# Altium PCB main.PcbDoc
Units mil, origin at the board's own origin, x right, y up, seen from the top; angles counter-clockwise.
Board outline 1600 x 1600 mil, 6 copper layers (Top Layer, GND Plane, Signal Layer 1, Signal Layer 2, VCC Plane, Bottom Layer), stack 61.4 mil thick; 101 components, 82 nets, 396 pads, 208 vias.
Unrouted connection lines stored in the file: 2.
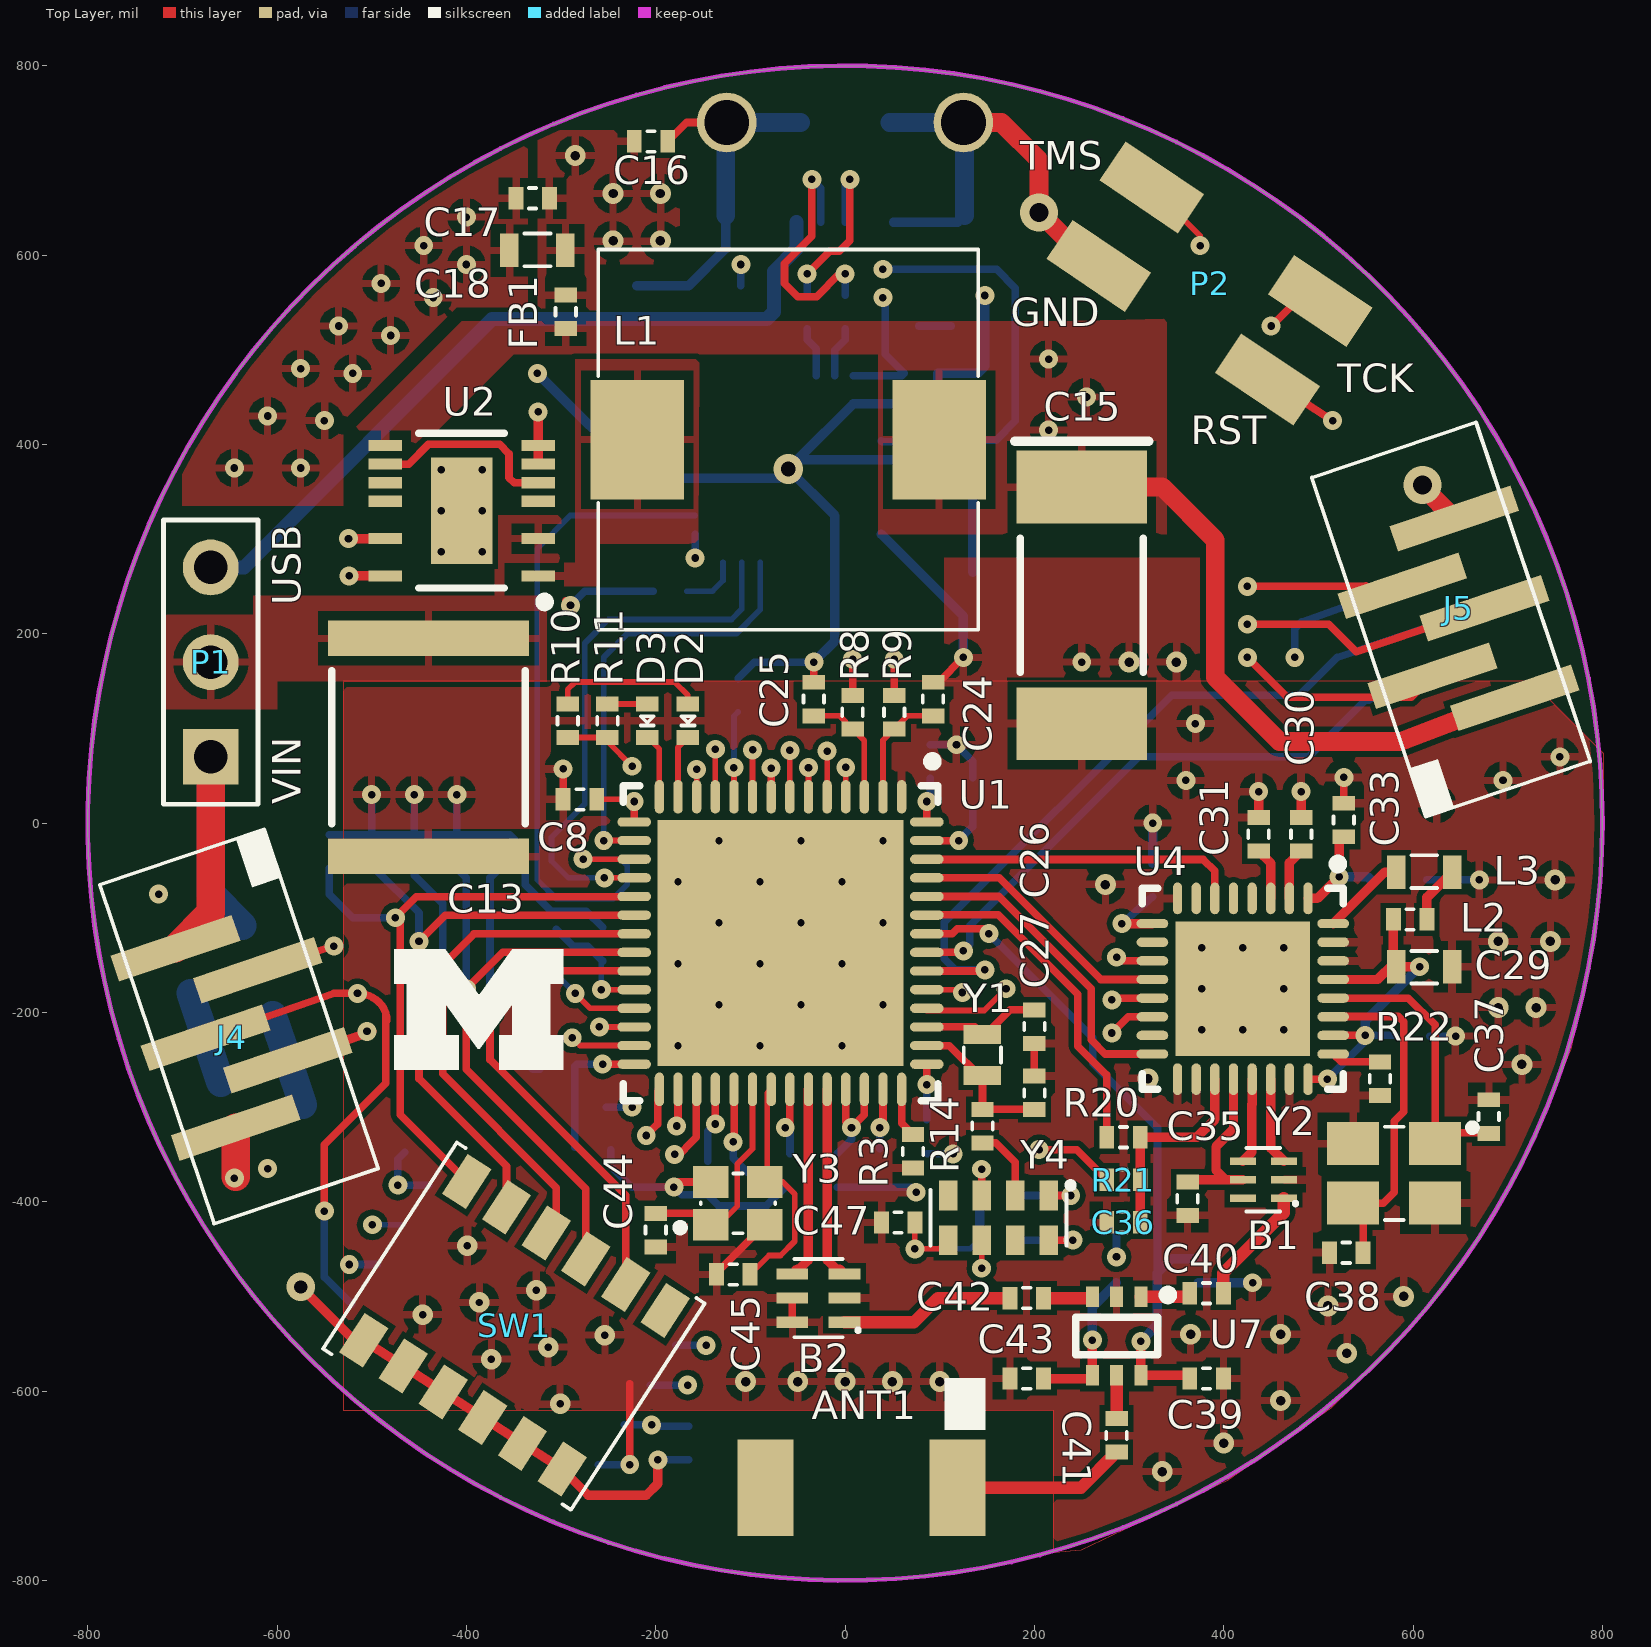
[diagram p0: Top Layer view]
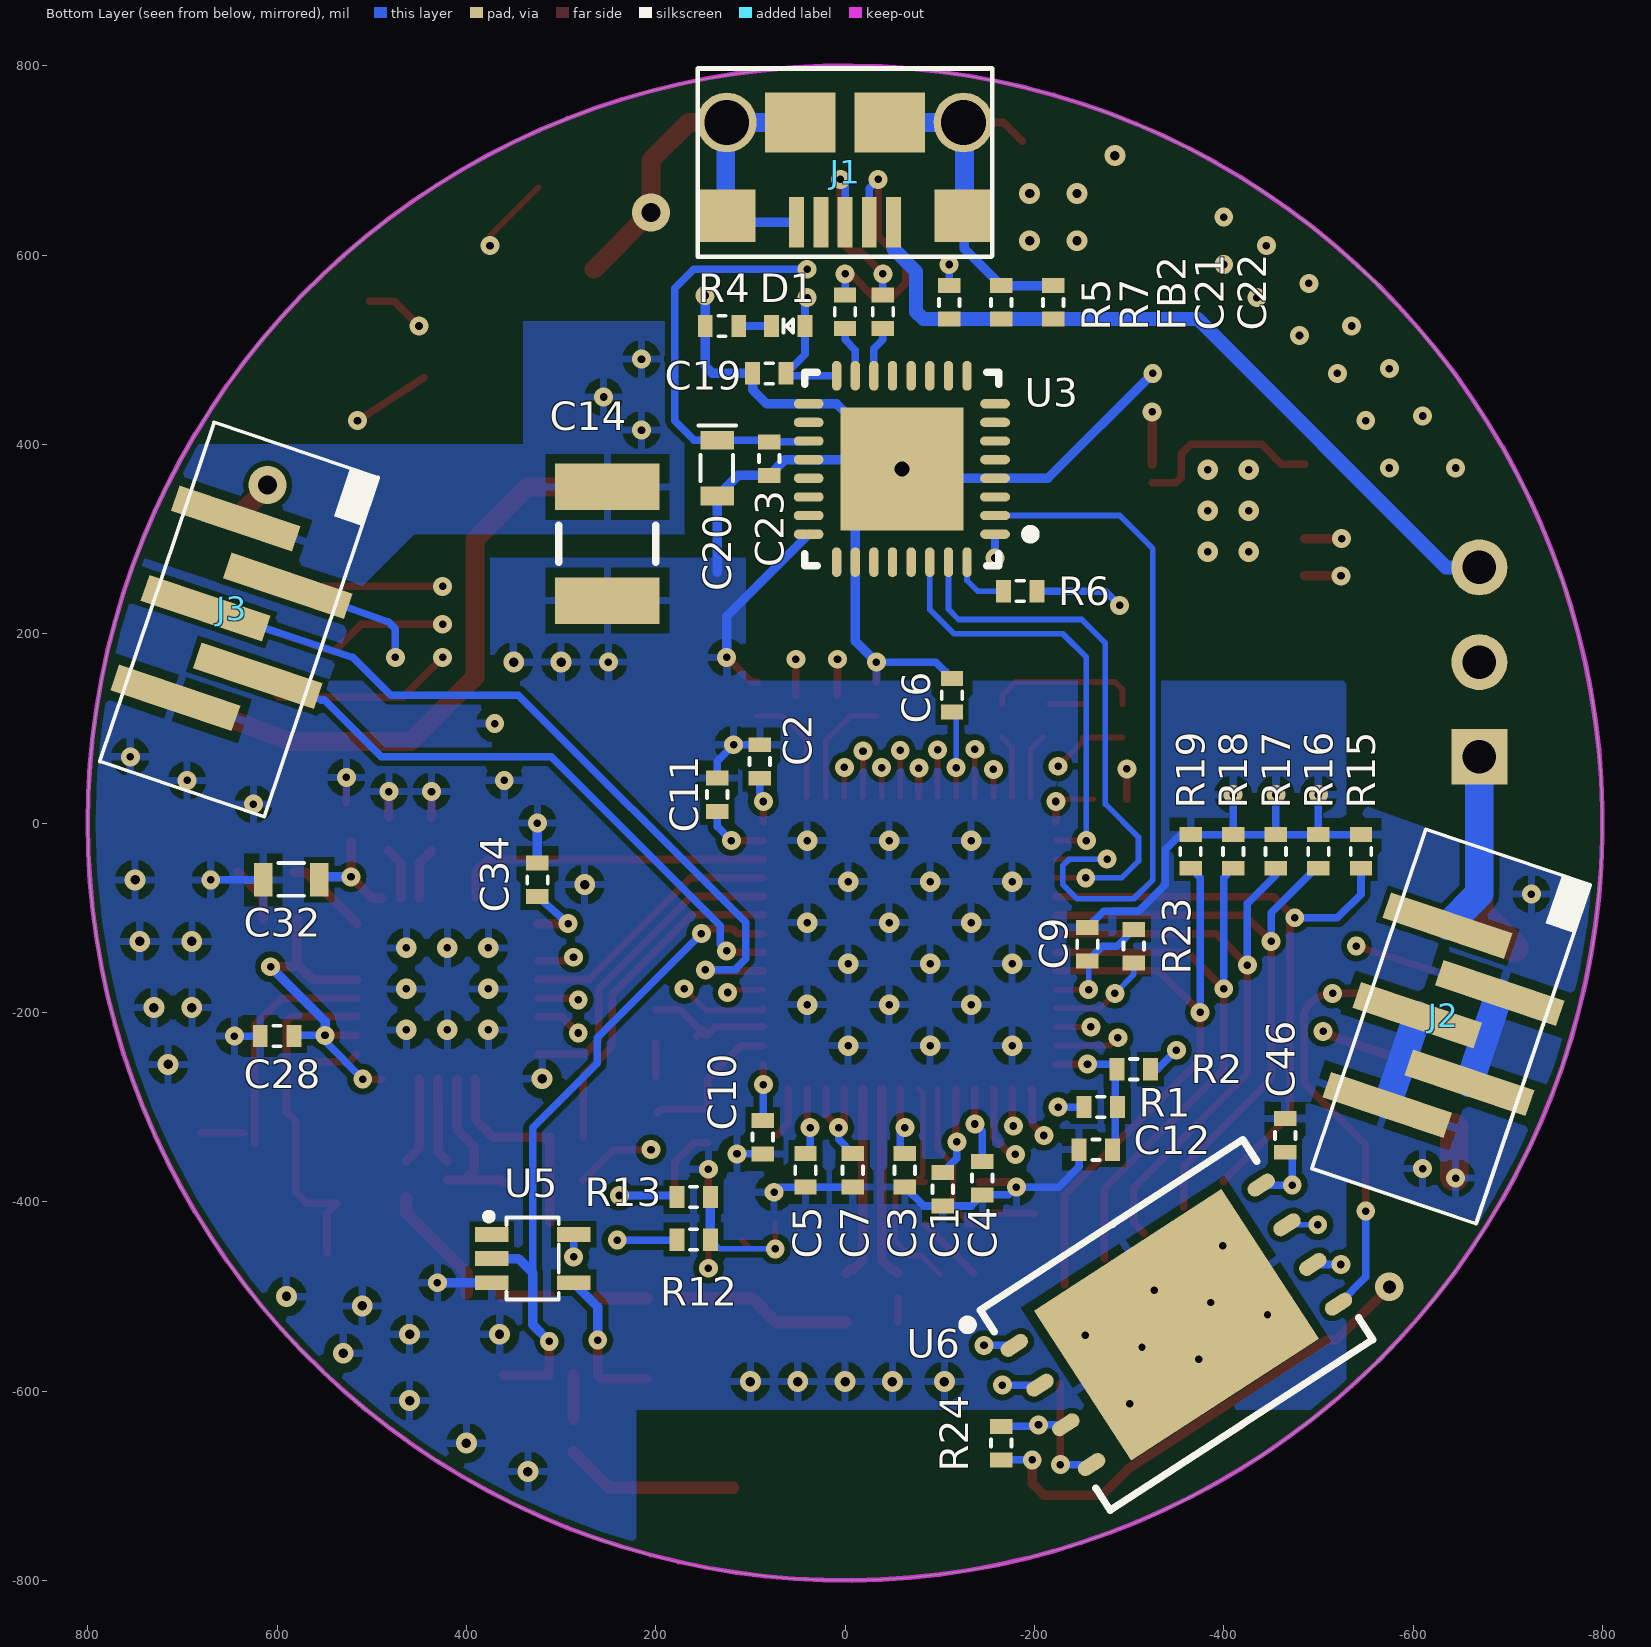
[diagram p1: Bottom Layer view, seen from below]
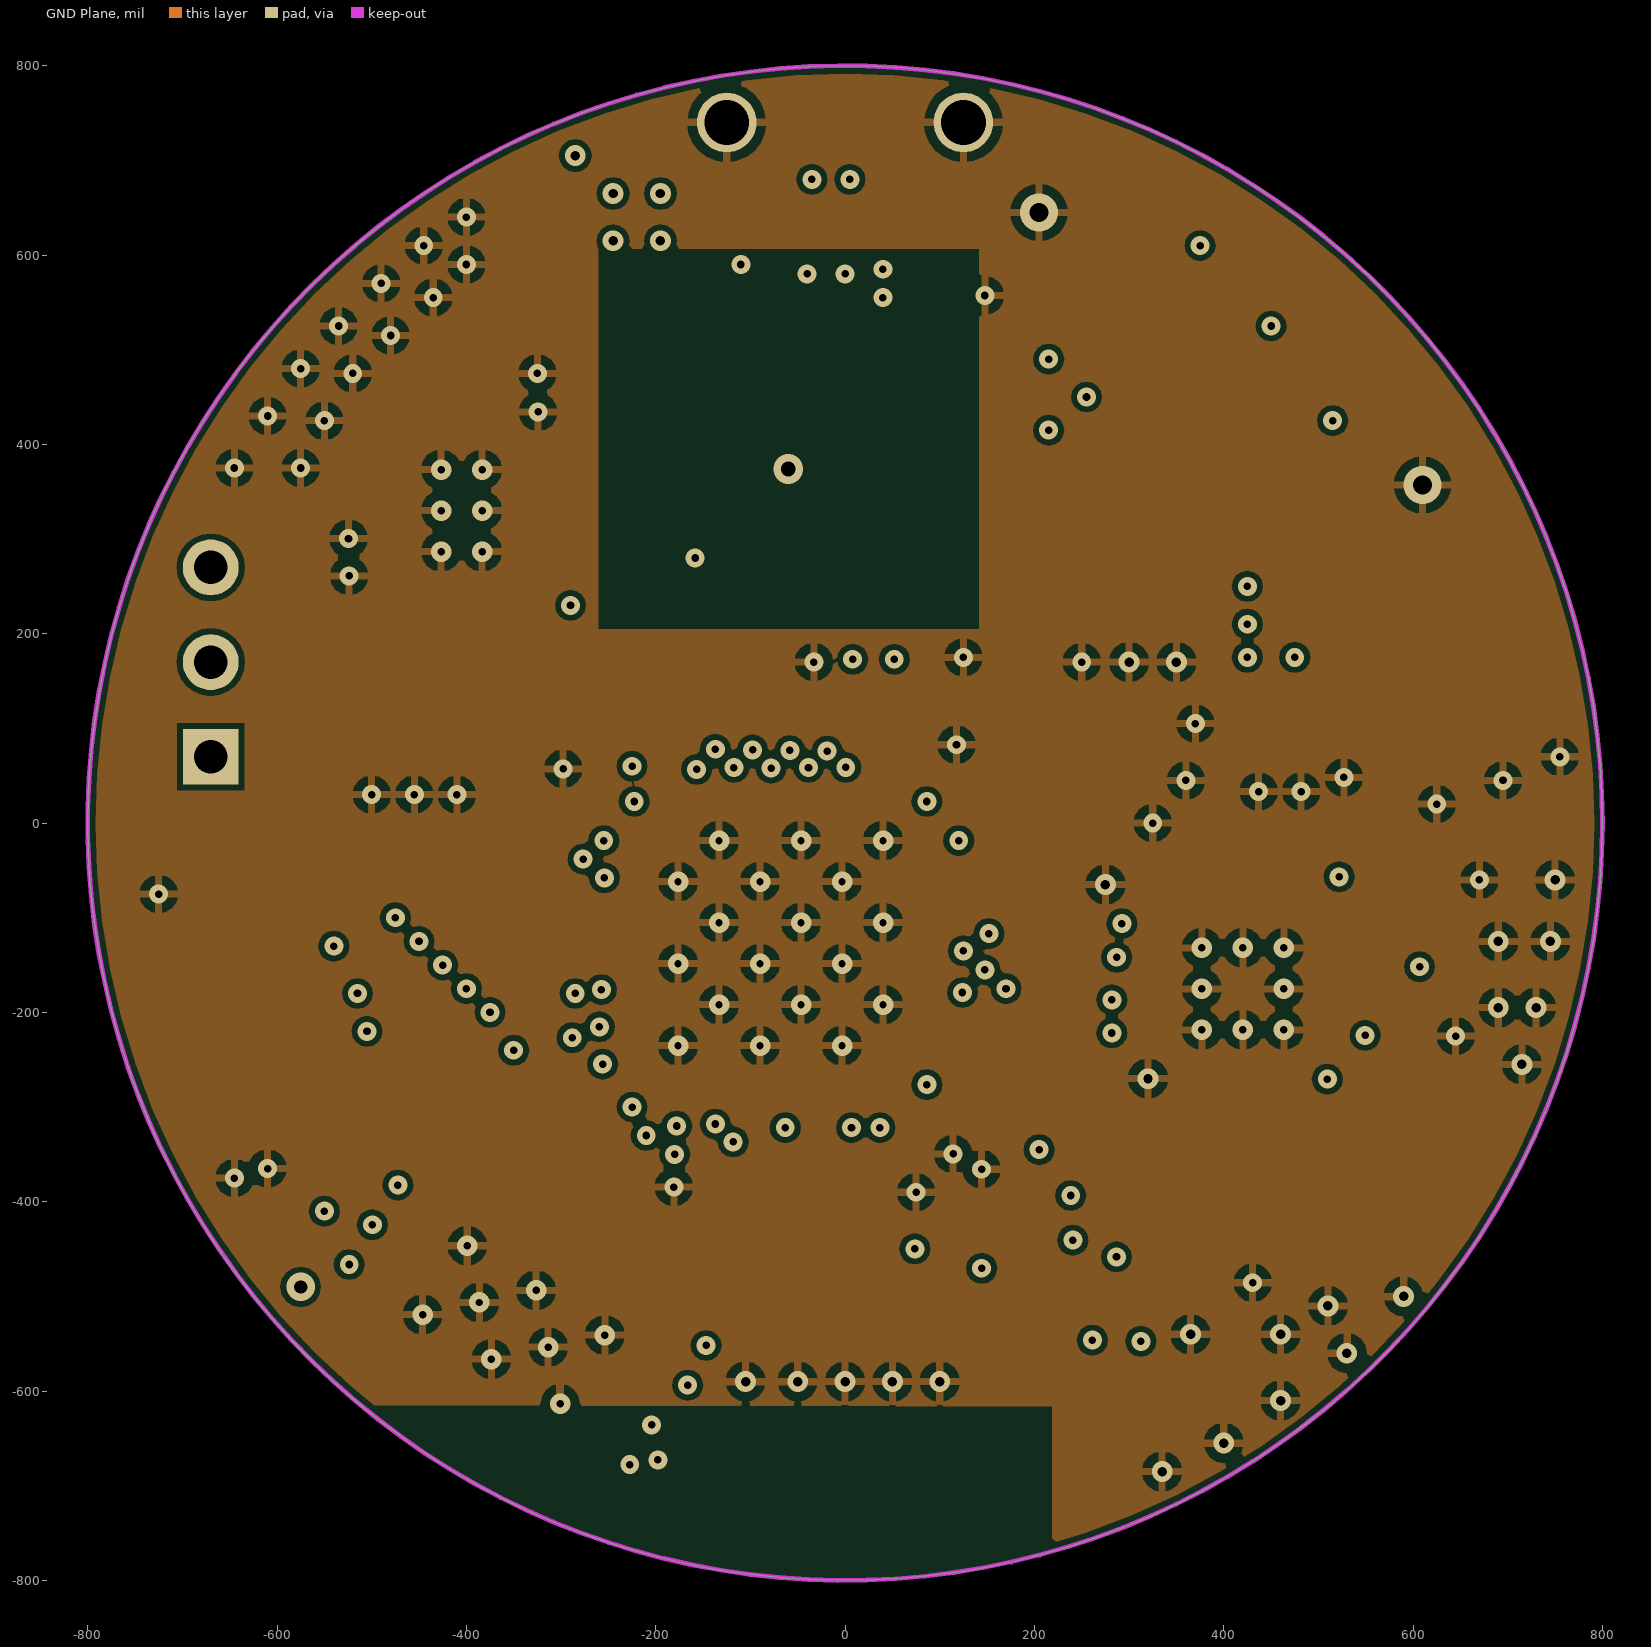
[diagram p2: GND Plane]
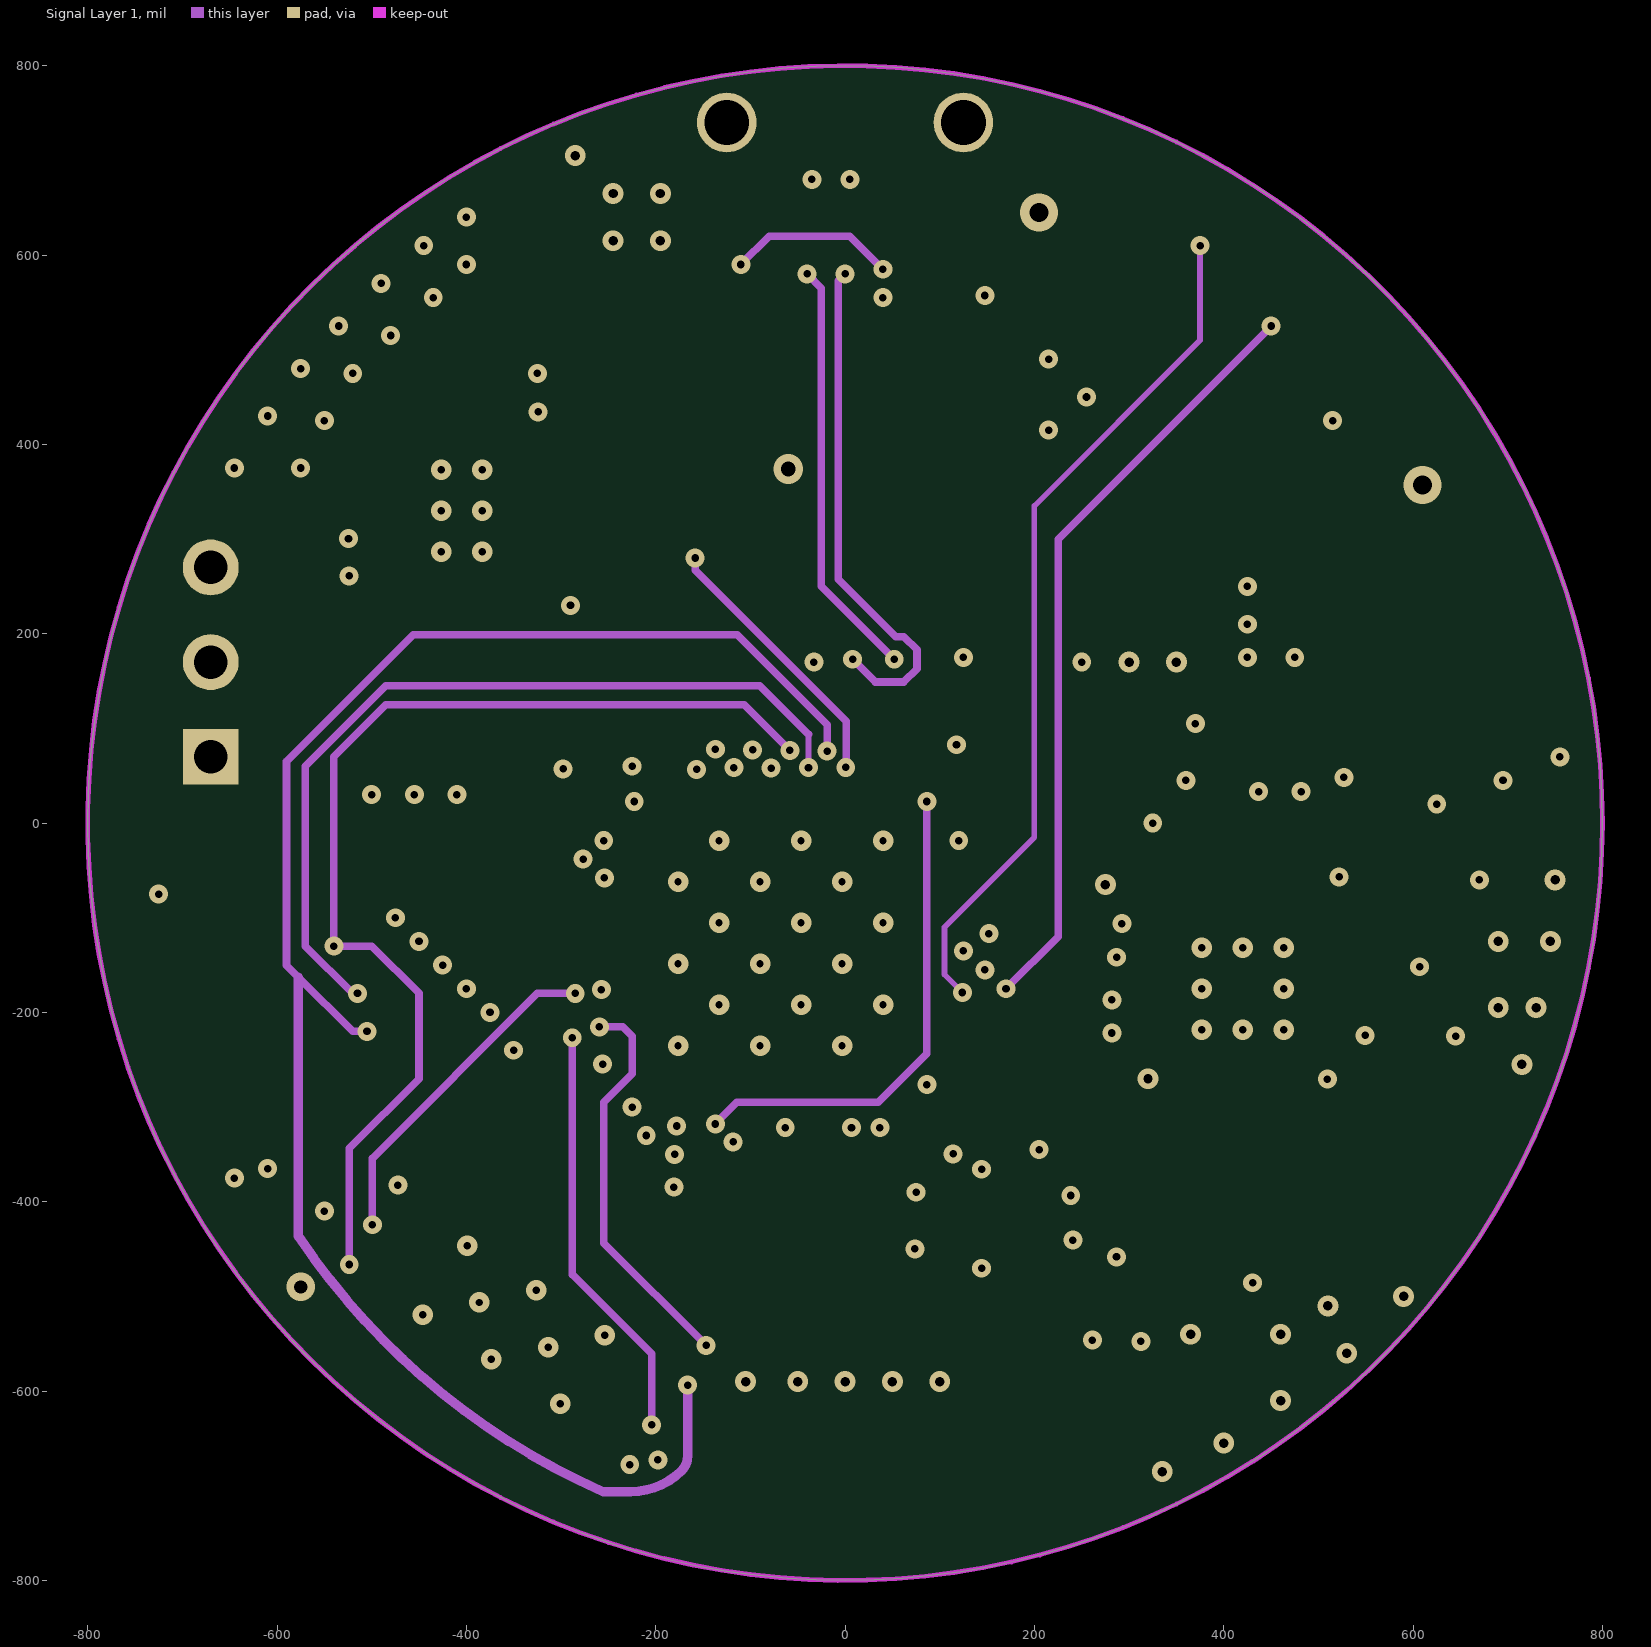
[diagram p3: Signal Layer 1]
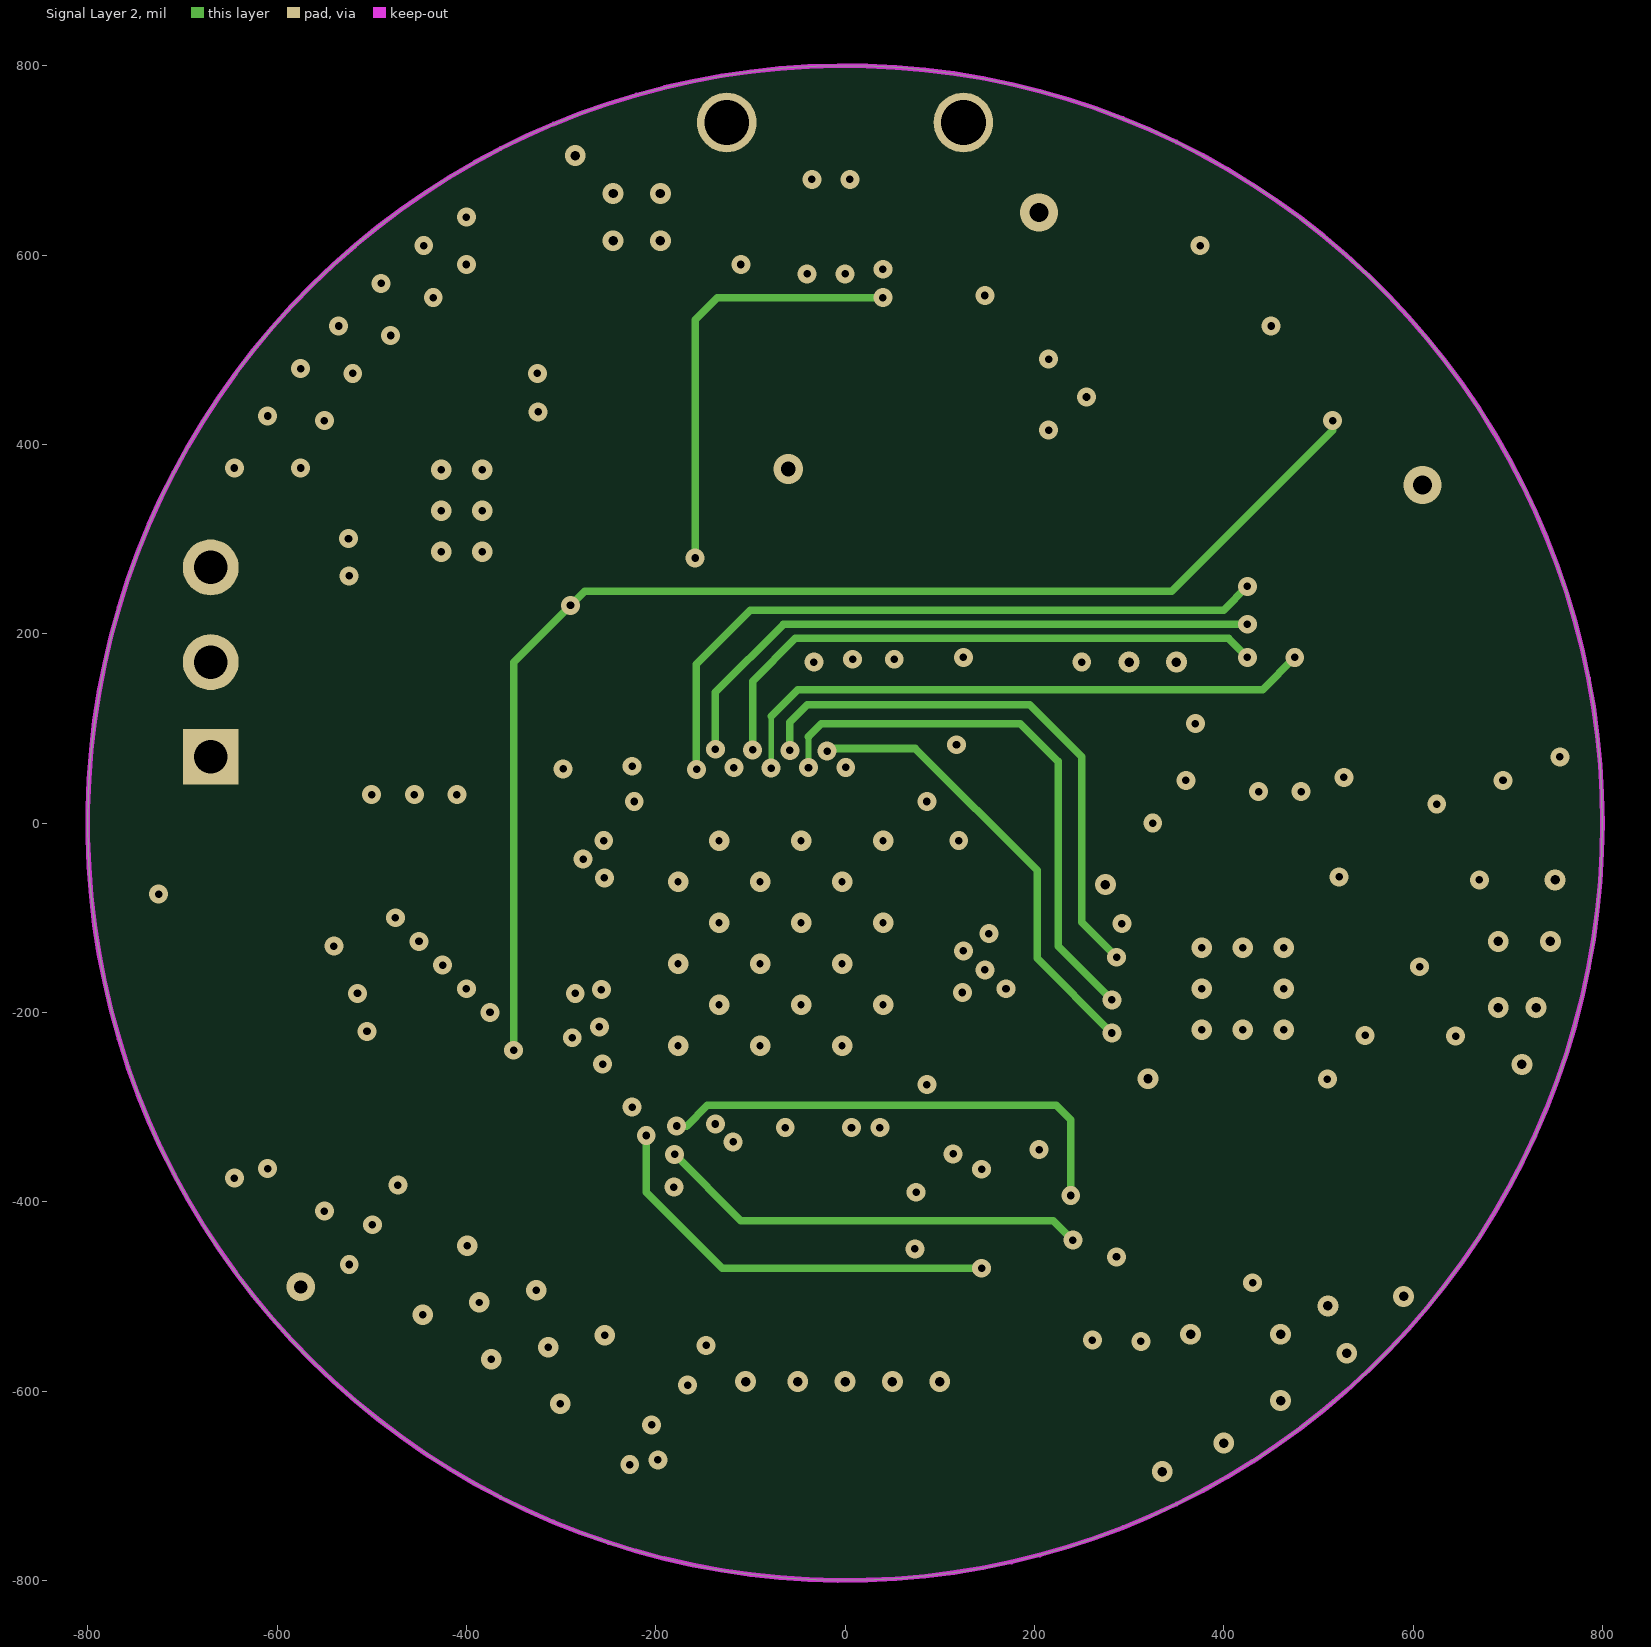
[diagram p4: Signal Layer 2]
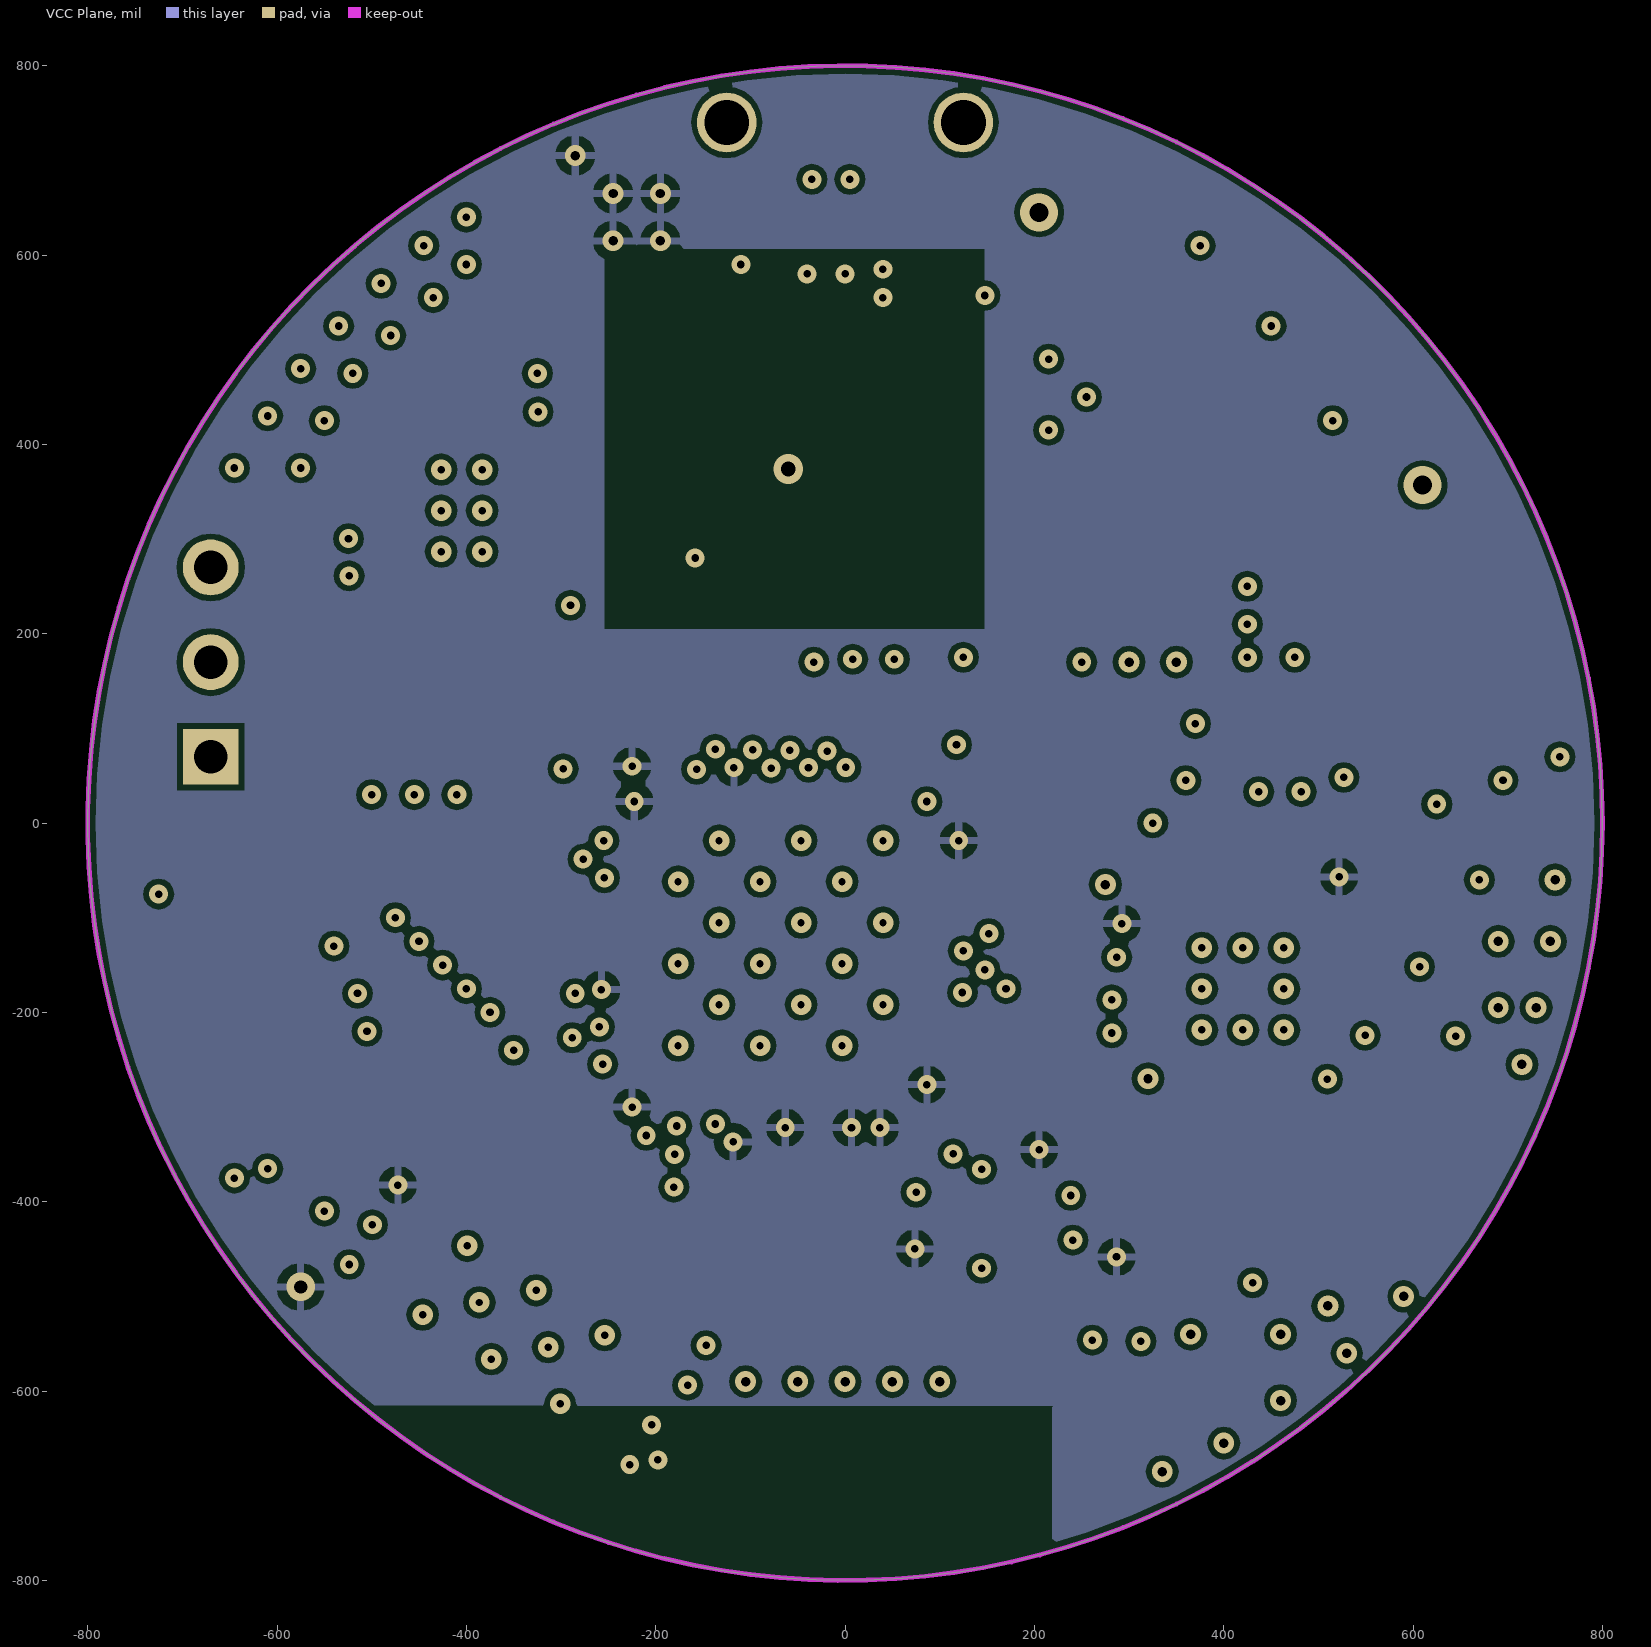
[diagram p5: VCC Plane]

## Layer stack, top to bottom
Top Solder: solder mask 0.4, Solder Resist, Dk 3.5
Top Layer: signal copper 1.9
Dielectric 1: core 7.2, PrePreg 2113, Dk 4.2
GND Plane: signal copper 1.4
Dielectric 6: prepreg 14, FR-4, Dk 4.2
Signal Layer 1: signal copper 1.4
Dielectric 5: core 9.6, PrePreg 2113, Dk 4.2
Signal Layer 2: signal copper 1.4
Dielectric 2: prepreg 14, FR-4, Dk 4.2
VCC Plane: signal copper 1.4
Dielectric 7: core 7.2, PrePreg2113, Dk 4.2
Bottom Layer: signal copper 1.9
Bottom Solder: solder mask 0.4, Solder Resist, Dk 3.5

## Board outline
-800,0 ccw(c0,0) 0,-800 ccw(c0,0) 800,0 ccw(c0,0) 0,800 ccw(c0,0)

## Design rules (kind name [scope] priority, off if disabled: settings)
Clearance "Clearance~Sunstone Circuits" [All] p1: gap=6 // Sunstone Circuits Minimum Clearance Rule (MLB~4&6 Layer Designs)
DiffPairsRouting [All] p1: maxlimit=10 minlimit=10 mostfreqgap=10 toplayer_minwidth=6 toplayer_maxwidth=15 toplayer_prefwidth=15 midlayer1_minwidth=6 midlayer1_maxwidth=15 midlayer1_prefwidth=15 midlayer2_minwidth=6 midlayer2_maxwidth=15 midlayer2_prefwidth=15 midlayer3_minwidth=6 midlayer3_maxwidth=15 midlayer3_prefwidth=15 midlayer4_minwidth=6 midlayer4_maxwidth=15 midlayer4_prefwidth=15 bottomlayer_minwidth=6 bottomlayer_maxwidth=15 bottomlayer_prefwidth=15 maxuncoupledlength=500
HoleSize "HoleSize~Sunstone Circuits" [All] p1: absolutevalues=TRUE maxlimit=251 minlimit=8 maxpercent=80.000 minpercent=20.000 // Sunstone Circuits Hole Size Rule (MLB~4&6 Layer Designs)
HoleSize Testpoint [All] p2: absolutevalues=TRUE maxlimit=100 minlimit=1 maxpercent=80.000 minpercent=20.000
HoleSize TestPointUsage [All] p3: absolutevalues=TRUE maxlimit=100 minlimit=1 maxpercent=80.000 minpercent=20.000
MinimumAnnularRing "MinimumAnnularRing~Sunstone Circuits" [All] p1: minimumring=6 // Sunstone Circuits Minimum Annular Ring (MLB~4&6 Layer Designs)
MinimumSolderMaskSliver [All] p1 off: minsoldermaskwidth=10
PlaneClearance "PlaneClearance~Sunstone Circuits" [All] p1: clearance=12 // Sunstone Circuits Power Plane Clearance Rule (MLB~4&6 Layer Designs)
PlaneConnect "PlaneConnect~Sunstone Circuits" [All] p1: planeconnectstyle=Relief reliefexpansion=10 reliefentries=4 reliefconductorwidth=8 reliefairgap=10 // Sunstone Circuits Power Plane Connect Rule (MLB~4&6 Layer Designs)
PolygonConnect "PolygonConnect~Sunstone Circuits" [All] p1: connectstyle=Relief reliefconductorwidth=8 reliefentries=4 polygonreliefangle="90 Angle" airgapwidth=10 // Sunstone Circuits Polygon Connect Style (MLB~4&6 Layer Designs)
RoomDefinition U_main_rtc [InComponentClass('U_main_rtc')] p1 off: confinementstyle=ConfineIn formatcopy=TRUE lockcomponents=FALSE outline -3501,-2693 -1501,-2693 -1501,-1693 -3501,-1693
RoomDefinition U_main_rf [InComponentClass('U_main_rf')] p2 off: confinementstyle=ConfineIn formatcopy=TRUE lockcomponents=FALSE outline -3501,-2693 -1501,-2693 -1501,-1693 -3501,-1693
RoomDefinition U_main_pwr [InComponentClass('U_main_pwr')] p3 off: confinementstyle=ConfineIn formatcopy=TRUE lockcomponents=FALSE outline -3501,-2693 -1501,-2693 -1501,-1693 -3501,-1693
RoomDefinition U_main_mem [InComponentClass('U_main_mem')] p4 off: confinementstyle=ConfineIn formatcopy=TRUE lockcomponents=FALSE outline -3501,-2693 -1501,-2693 -1501,-1693 -3501,-1693
RoomDefinition U_main_IO [InComponentClass('U_main_IO')] p5 off: confinementstyle=ConfineIn formatcopy=TRUE lockcomponents=FALSE outline -3501,-2693 -1501,-2693 -1501,-1693 -3501,-1693
RoomDefinition U_main_ftdi [InComponentClass('U_main_ftdi')] p6 off: confinementstyle=ConfineIn formatcopy=TRUE lockcomponents=FALSE outline -3501,-2693 -1501,-2693 -1501,-1693 -3501,-1693
RoomDefinition U_main_connector [InComponentClass('U_main_connector')] p7 off: confinementstyle=ConfineIn formatcopy=TRUE lockcomponents=FALSE outline -3501,-2693 -1501,-2693 -1501,-1693 -3501,-1693
RoutingVias "RoutingVias~Sunstone Circuits" [All] p1: holewidth=16 width=30 viastyle="Through Hole" minholewidth=8 minwidth=18 maxholewidth=20 maxwidth=40 // Sunstone Circuits Routing Vias Rule (MLB~4&6 Layer Designs)
ShortCircuit "ShortCircuit~Sunstone Circuits" [All] p1: allowed=FALSE // Sunstone Circuits Short Circuit Rule~Do Not Allow (MLB~4&6 Layer Designs)
SilkToSilkClearance [All] p1 off: silktosilkclearance=10
SilkToSolderMaskClearance [IsPad] p1 off: minsilkscreentomaskgap=10 clearancetoexposedcopper=TRUE
SolderMaskExpansion "Tent Vias" [isvia] p1: expansion=-12 // Sunstone Circuits Solder Mask Expansion Rule (MLB~4&6 Layer Designs)
SolderMaskExpansion "SolderMaskExpansion~Sunstone Circuits" [All] p2: expansion=3 // Sunstone Circuits Solder Mask Expansion Rule (MLB~4&6 Layer Designs)
UnpouredPolygon [All] p1: allowunpoured=FALSE
ViasUnderSMD "ViasUnderSMD~Sunstone Circuits" [All] p1: allowed=FALSE // Sunstone Circuits Vias Under SMD~Do Not Allow (MLB~4&6 Layer Designs)
Width "Width~Sunstone Circuits" [All] p1: maxlimit=100 minlimit=6 preferedwidth=10 // Sunstone Circuits Minimum Width Rule (MLB~4&6 Layer Designs)
21 further rules are at their usual default settings.

## Classes and differential pairs
component class U_main_rtc: C47 Y4
component class U_main_rf: ANT1 B1 B2 C28 C29 C30 C31 C32 C33 C34 C35 C36 C37 C38 C39 C40 C41 C42 C43 C44 C45 L2 L3 R20 R21 R22 U4 U5 U7 Y2 Y3
component class U_main_pwr: C1 C2 C3 C4 C5 C6 C7 C8 C9 C10 C11 C12 C13 C14 C15 C16 C17 C18 FB1 L1 P1 R1 R2 R3 U1 U2
component class U_main_mem: C46 R23 R24 U6
component class U_main_IO: C26 C27 D2 D3 R10 R11 R12 R13 R14 R15 R16 R17 R18 R19 SW1 Y1
component class U_main_ftdi: C19 C20 C21 C22 C23 C24 C25 D1 FB2 J1 R4 R5 R6 R7 R8 R9 U3
component class U_main_connector: J2 J3 J4 J5 P2
differential pair USB: +USB_P -USB_N
differential pair USB_MCU: +USB_MCU_P -USB_MCU_N
differential pair USB_FTDI: +USB_FTDI_P -USB_FTDI_N
differential pair CC2538_RF: +CC2538_RF_P -CC2538_RF_N
differential pair BLE_ANT: +BLE_ANT_P -BLE_ANT_N

## Components (designator, comment, footprint, x,y, rotation, side; value= is the part's Value field where it differs from the comment)
ANT1 "Ground Antenna" "Chip Antenna" 37,-707 r180 top
B1 "2450BM14A0002" 2450BM14A0002 441.83,-376.78 r180 top
B2 "2450BM15A0002E" 2450BM15A0002 -28.17,-501.78 r180 top
C1 "Ceramic capacitor" 0402 -103.17,-386.78 r270 bottom
C2 "Ceramic capacitor" 0402 90,65 r90 bottom
C3 "Ceramic capacitor" 0402 -63.17,-366.78 r270 bottom
C4 "Ceramic capacitor" 0402 -145,-375 r270 bottom
C5 "Ceramic capacitor" 0402 41.83,-366.78 r270 bottom
C6 "Ceramic capacitor" 0402 -113,135 r90 bottom
C7 "Ceramic capacitor" 0402 -8.17,-366.78 r270 bottom
C8 "Ceramic capacitor" 0402 -280,25 r180 top
C9 "Ceramic capacitor" 0402 -256,-128 r90 bottom
C10 "Ceramic capacitor" 0402 86.83,-331.78 r270 bottom
C11 "Ceramic capacitor" 0402 135,30 r90 bottom
C12 "Ceramic capacitor" 0402 -265,-345 r0 bottom
C13 "Ceramic capacitor" 2220 -440,80 r270 top
C14 "Ceramic capacitor" 1210 255,295 r90 bottom
C15 "Ceramic capacitor" 2917 250,230 r270 top
C16 "Ceramic capacitor" 0402 -205,720 r0 top
C17 "Ceramic capacitor" 0402 -330,660 r180 top
C18 "Ceramic capacitor" 0603 -325,605 r180 top
C19 "Ceramic capacitor" 0402 80,475 r0 bottom
C20 "Tantalum capacitor" "0603 - Polar Marking" 135,375 r270 bottom
C21 "Ceramic capacitor" 0402 -165,550 r90 bottom
C22 "Ceramic capacitor" 0402 -220,550 r90 bottom
C23 "Ceramic capacitor" 0402 80,385 r270 bottom
C24 "Ceramic capacitor" 0402 93,131 r90 top
C25 "Ceramic capacitor" 0402 -33,131 r90 top
C26 "Ceramic capacitor" 0402 200,-215 r270 top
C27 "Ceramic capacitor" 0402 200,-285 r90 top
C28 "Ceramic capacitor" 0402 600,-225 r0 bottom
C29 "Ceramic capacitor" 0603 611.83,-151.78 r0 top
C30 "Ceramic capacitor" 0402 481.83,-11.78 r90 top
C31 "Ceramic capacitor" 0402 436.83,-11.78 r90 top
C32 "Ceramic capacitor" 0603 585,-60 r0 bottom
C33 "Ceramic capacitor" 0402 526.83,3.22 r90 top
C34 "Ceramic capacitor" 0402 325,-60 r90 bottom
C35 "Ceramic capacitor" 0402 361.83,-396.78 r270 top
C36 "Ceramic capacitor" 0402 294.12,-421.78 r180 top
C37 "Ceramic capacitor" 0402 680,-310 r90 top
C38 "Ceramic capacitor" 0402 529.48,-453.9 r180 top
C39 "Ceramic capacitor" 0402 381.83,-586.78 r180 top
C40 "Ceramic capacitor" 0402 381.83,-496.78 r180 top
C41 "Ceramic capacitor" 0402 286.83,-646.78 r270 top
C42 "Ceramic capacitor" 0402 191.83,-501.78 r0 top
C43 "Ceramic capacitor" 0402 191.83,-586.78 r180 top
C44 "Ceramic capacitor" 0402 -200,-430 r90 top
C45 "Ceramic capacitor" 0402 -118.17,-476.78 r0 top
C46 "Ceramic capacitor" 0402 -465,-330 r90 bottom
C47 "Ceramic capacitor" 0402 56,-422 r180 top
D1 "LED, Green" "0402 - DIODE" 60,525 r0 bottom
D2 "LED, Red" "0402 - DIODE" -166,108 r270 top
D3 "LED, Green" "0402 - DIODE" -209,108 r270 top
FB1 "Ferrite Bead" 0402 -295,540 r270 top
FB2 "Ferrite Bead" 0402 -110,550 r270 bottom
J1 "micro USB-B" "Micro USB-B" 0,740 r0 bottom
J2 "Samtec connector" SFM-105-02-L-S -640,-215 r288.6 bottom
J3 "Samtec connector" SFM-105-02-L-S 640,215 r288.6 bottom locked
J4 "Samtec connector" SFM-105-02-L-S -640,-215 r288.6 top
J5 "Samtec connector" SFM-105-02-L-S 640,215 r108.6 top locked
L1 "L_22uH_SLF10145" SLF10145 -60,405 r180 top
L2 "Chip inductor" 0402 596.83,-101.78 r0 top
L3 "Chip inductor" 0603 611.83,-51.78 r180 top
P1 "1 x 3 header" "1x3 header" -670,170 r90 top
P2 "2 x 2 header SMD" "2x2 header SMD" 385,570 r56 top
R1 "Chip resistor" 0402 -270,-300 r180 bottom
R2 "Chip resistor" 0402 -305,-260 r180 bottom
R3 "Chip resistor" 0402 71.83,-346.78 r270 top
R4 "Chip resistor" 0402 130,525 r0 bottom
R5 "Chip resistor" 0402 0,540 r90 bottom
R6 "Chip resistor" 0402 -185,245 r180 bottom
R7 "Chip resistor" 0402 -40,540 r90 bottom
R8 "Chip resistor" 0402 8,117 r270 top
R9 "Chip resistor" 0402 52,117 r270 top
R10 "Chip resistor" 0402 -293,108 r270 top
R11 "Chip resistor" 0402 -251,108 r270 top
R12 "Chip resistor" 0402 160,-440 r0 bottom
R13 "Chip resistor" 0402 160,-395 r0 bottom
R14 "Chip resistor" 0402 145.19,-320.16 r270 top
R15 "Chip resistor" 0402 -545,-30 r270 bottom
R16 "Chip resistor" 0402 -500,-30 r270 bottom
R17 "Chip resistor" 0402 -455,-30 r270 bottom
R18 "Chip resistor" 0402 -410,-30 r270 bottom
R19 "Chip resistor" 0402 -365,-30 r270 bottom
R20 "Chip resistor" 0402 294.12,-331.78 r0 top
R21 "Chip resistor" 0402 294.12,-376.78 r180 top
R22 "Chip resistor" 0402 565,-270 r270 top
R23 "Chip resistor" 0402 -305,-130 r270 bottom
R24 "Chip resistor" 0402 -165,-655 r90 bottom
SW1 "CHS-06TA" CHS-06TA -350,-530 r57 top
U1 "CC2538" QFN56 -68.17,-126.78 r270 top
U2 "LTC3630" MSE16(12) -405,330 r180 top
U3 "FT232RQ" QFN-32 -60,374 r0 bottom
U4 "nRF8001" QFN32 420.14,-175.09 r270 top
U5 "SN74AUP1T14" "SC-70-5 (DCK)" 330,-460 r270 bottom
U6 "SST25VF064C" WSON -350,-530 r147 bottom
U7 "uPG2214TB" minimold-6 286.83,-541.78 r270 top
Y1 "ABS05" ABS05 145,-245 r90 top
Y2 "TSX-3225" TSX-3225 580,-370 r180 top
Y3 "FA-128" FA-128 -113.17,-401.78 r0 top
Y4 "RV-4162-C7" RV4162 162,-417 r180 top

## Footprints (in the part's own frame and the unit in brackets; to place one, negate y for a bottom-side part, rotate by r counter-clockwise, add the part's x,y. Pads: shape width x height; smd on the part's side, far side on the other; paste and mask are expansions set on the pad)
"1x3 header" [mm] "1x3 header, 100 mils"
  rect 1.5x1.5 hole 0.9: 1(-2.54,0)
  round 1.5 hole 0.9: 2(0,0) 3(2.54,0)
  silkscreen extent -3.81,-1.27 3.81,1.27, body extent -3.8,-1.25 3.8,1.25, height 8.38
"2x2 header SMD" [mm] "100 mils header, SMD"
  rect 1.27x2.54 smd: 1(-1.27,-2.73) 2(-1.27,2.73) 3(1.27,-2.73) 4(1.27,2.73)
  body extent -2.54,-3.43 2.54,3.43, height 9.7
0402 [mm] "2-Leads, Body 1.00x0.50mm, IPC Medium Density"
  rect 0.4x0.6 smd: 1(-0.45,0) 2(0.45,0)
  silkscreen extent -0.1,-0.28 0.1,0.28, body extent -0.53,-0.28 0.53,0.27, height 0.4
"0402 - DIODE" [mm] "2-Leads, Body 1.00x0.50mm, IPC Medium Density"
  rect 0.4x0.6 smd: 1(-0.45,0) 2(0.45,0)
  silkscreen extent -0.13,-0.18 0.13,0.18, body extent -0.53,-0.28 0.53,0.27, height 0.4
0603 [mm] "2-Leads, Body 1.55x0.85mm, IPC Medium Density"
  rect 0.5x0.9 smd: 1(-0.75,0) 2(0.75,0)
  silkscreen extent -0.35,-0.45 0.35,0.43, body extent -0.75,-0.42 0.75,0.43, height 0.5
"0603 - Polar Marking" [mm] "2-Leads, Body 1.55x0.85mm, IPC Medium Density"
  rect 0.5x0.9 smd: 1(-0.75,0) 2(0.75,0)
  silkscreen extent -1.14,-0.51 0.35,0.51, body extent -0.75,-0.42 0.75,0.43, height 0.5
1210 [mm]
  rect 1.25x2.8 smd: 1(1.525,-0.102) 2(-1.525,-0.102)
  silkscreen extent -0.5,-1.4 0.5,1.2, body extent -1.8,-1.5 1.8,1.3, height 2.8
2220 [mm] "Chip Capacitor, 2-Leads, Body 5.70x5.00mm, IPC Medium Density"
  rect 0.95x5.4 smd: 1(-2.925,0) 2(2.925,0)
  silkscreen extent -2.05,-2.6 2.05,2.6, body extent -3.05,-2.7 3.05,2.7, height 2.5
2450BM14A0002 [mm] "Chip Array, Flat, 6-Leads, Pitch 0.50mm,  Body 1.60x0.80mm,  IPC Medium Density"
  rect 0.7x0.2 smd: 1(-0.55,0.5) 2(-0.55,0) 3(-0.55,-0.5) 4(0.55,-0.5) 5(0.55,0) 6(0.55,0.5)
  silkscreen extent -0.91,-0.85 0.45,0.85, body extent -0.45,-0.85 0.45,0.85, height 0.71
2450BM15A0002 [mm] "Chip Array, Flat, 6-Leads, Pitch 0.65mm,  Body 2.00x1.25mm,  IPC Medium Density"
  rect 0.85x0.3 smd: 1(-0.7,0.65) 2(-0.7,0) 3(-0.7,-0.65) 4(0.7,-0.65) 5(0.7,0) 6(0.7,0.65)
  silkscreen extent -1.11,-1.05 0.65,1.05, body extent -0.67,-1.05 0.67,1.05, height 0.81
2917 [mm] "Chip Capacitor, 2-Leads, Body 7.30x3.20mm, IPC Medium Density"
  rect 1.95x3.5 smd: 1(-3.175,0) 2(3.175,0)
  silkscreen extent -4.4,-1.8 1.8,1.8, body extent -3.8,-1.75 3.8,1.75, height 3.1
ABS05 [mm] "ABS05 Crystal"
  rect 0.5x1 smd: 1(-0.55,0) 2(0.55,0)
  silkscreen extent -0.2,-0.5 0.2,0.5, body extent -0.8,-0.5 0.8,0.5, height 0.5
"Chip Antenna" [mm] "FR05-S1-N-0-102"
  rect 1.5x2.6 smd: 1(-2.075,-0.125) ""(3.075,-0.125)
  silkscreen extent -2.83,-3.08 -1.73,-1.68, body extent -3.03,-1.63 3.98,1.38, height 2.2
CHS-06TA [mil] "6 POS DIP SWITCH"
  rect 50x29.92 smd: 1(-100,124) 2(100,124) 3(-100,74) 4(100,74) 5(-100,24) 6(100,24) 7(-100,-26) 8(100,-26) 9(-100,-76) 10(100,-76) 11(-100,-126) 12(100,-126)
  silkscreen extent -131,-157 129,155, body extent -131,-157 129,155, height 98
FA-128 [mm] "Seiko Epson FA-128 Crystal"
  rect 0.95x0.85 smd: 1(-0.725,-0.575) 2(0.725,-0.575) 3(0.725,0.575) 4(-0.725,0.575)
  silkscreen extent -1.63,-0.8 1,0.8, body extent -1,-0.8 1,0.8, height 0.5
"Micro USB-B" [mm]
  rect 0.4x1.35 smd mask+0.1: 1(-1.3,2.675) 2(-0.65,2.675) 3(0,2.675) 4(0.65,2.675) 5(1.3,2.675)
  rect 1.6x1.4 smd mask+0.1: 6(-3.2,2.5) 6(3.2,2.5)
  round 1.6 hole 1.2: 6(-3.175,0) 6(3.175,0)
  rect 1.9x1.6 smd mask+0.1: 6(-1.2,0) 6(1.2,0)
  silkscreen extent -3.95,-1.45 3.95,3.6, body extent -4.1,-2.54 4.1,2.89, height 2.68
minimold-6 [mm] "SOTFL, 6-Leads, Body 2.00x2.10mm, Pitch 0.65mm, IPC Medium Density"
  rect 0.55x0.35 smd: 1(-1.05,0.65) 2(-1.05,0) 3(-1.05,-0.65) 4(1.05,-0.65) 5(1.05,0) 6(1.05,0.65)
  silkscreen extent -1.22,-1.1 0.5,1.5, body extent -0.67,-1.1 0.67,1.1, height 1
MSE16(12) [mm] "TSSOP, 16-Leads, Body 4.04x3.00mm, Pitch 0.50mm, Thermal Pad 2.95x1.75mm, IPC Medium Density"
  rect 0.9x0.3 smd: 1(-2.05,1.75) 3(-2.05,0.75) 5(-2.05,-0.25) 6(-2.05,-0.75) 7(-2.05,-1.25) 8(-2.05,-1.75) 9(2.05,-1.75) 10(2.05,-1.25) 11(2.05,-0.75) 12(2.05,-0.25) 14(2.05,0.75) 16(2.05,1.75)
  rect 1.65x2.85 smd: 17(0,0)
  silkscreen extent -2.35,-2.08 1.15,2.57, body extent -1.55,-2.05 1.55,2.05, height 1.1
QFN32 [mm] "QFN, 32-Leads, Body 5.00x5.00mm, Pitch 0.50mm, Thermal Pad 3.60x3.60mm, IPC Medium Density"
  oval 0.85x0.25 smd: 1(-2.425,1.75) 2(-2.425,1.25) 3(-2.425,0.75) 4(-2.425,0.25) 5(-2.425,-0.25) 6(-2.425,-0.75) 7(-2.425,-1.25) 8(-2.425,-1.75) 17(2.425,-1.75) 18(2.425,-1.25) 19(2.425,-0.75) 20(2.425,-0.25) 21(2.425,0.25) 22(2.425,0.75) 23(2.425,1.25) 24(2.425,1.75)
  oval 0.25x0.85 smd: 9(-1.75,-2.425) 10(-1.25,-2.425) 11(-0.75,-2.425) 12(-0.25,-2.425) 13(0.25,-2.425) 14(0.75,-2.425) 15(1.25,-2.425) 16(1.75,-2.425) 25(1.75,2.425) 26(1.25,2.425) 27(0.75,2.425) 28(0.25,2.425) 29(-0.25,2.425) 30(-0.75,2.425) 31(-1.25,2.425) 32(-1.75,2.425)
  rect 3.6x3.6 smd: 33(0,0)
  silkscreen extent -3.47,-2.7 2.7,2.7, body extent -2.55,-2.55 2.55,2.55, height 0.9
QFN56 [mm] "QFN, 56-Leads, Body 8.00x8.00mm, Pitch 0.50mm, Thermal Pad 6.60x6.60mm, IPC Medium Density"
  oval 0.9x0.25 smd: 1(-3.925,3.25) 2(-3.925,2.75) 3(-3.925,2.25) 4(-3.925,1.75) 5(-3.925,1.25) 6(-3.925,0.75) 7(-3.925,0.25) 8(-3.925,-0.25) 9(-3.925,-0.75) 10(-3.925,-1.25) 11(-3.925,-1.75) 12(-3.925,-2.25) 13(-3.925,-2.75) 14(-3.925,-3.25) 29(3.925,-3.25) 30(3.925,-2.75) 31(3.925,-2.25) 32(3.925,-1.75) 33(3.925,-1.25) 34(3.925,-0.75) 35(3.925,-0.25) 36(3.925,0.25) 37(3.925,0.75) 38(3.925,1.25) 39(3.925,1.75) 40(3.925,2.25) 41(3.925,2.75) 42(3.925,3.25)
  oval 0.25x0.9 smd: 15(-3.25,-3.925) 16(-2.75,-3.925) 17(-2.25,-3.925) 18(-1.75,-3.925) 19(-1.25,-3.925) 20(-0.75,-3.925) 21(-0.25,-3.925) 22(0.25,-3.925) 23(0.75,-3.925) 24(1.25,-3.925) 25(1.75,-3.925) 26(2.25,-3.925) 27(2.75,-3.925) 28(3.25,-3.925) 43(3.25,3.925) 44(2.75,3.925) 45(2.25,3.925) 46(1.75,3.925) 47(1.25,3.925) 48(0.75,3.925) 49(0.25,3.925) 50(-0.25,3.925) 51(-0.75,3.925) 52(-1.25,3.925) 53(-1.75,3.925) 54(-2.25,3.925) 55(-2.75,3.925) 56(-3.25,3.925)
  rect 6.6x6.6 smd: 57(0,0)
  silkscreen extent -5,-4.22 4.22,4.23, body extent -4.08,-4.07 4.07,4.08, height 1
QFN-32 [mm] "32-Pin QFN 0.5 mm Pitch"
  oval 0.8x0.25 smd: 1(-2.5,1.75) 2(-2.5,1.25) 3(-2.5,0.75) 4(-2.5,0.25) 5(-2.5,-0.25) 6(-2.5,-0.75) 7(-2.5,-1.25) 8(-2.5,-1.75) 17(2.5,-1.75) 18(2.5,-1.25) 19(2.5,-0.75) 20(2.5,-0.25) 21(2.5,0.25) 22(2.5,0.75) 23(2.5,1.25) 24(2.5,1.75)
  oval 0.25x0.8 smd: 9(-1.75,-2.5) 10(-1.25,-2.5) 11(-0.75,-2.5) 12(-0.25,-2.5) 13(0.25,-2.5) 14(0.75,-2.5) 15(1.25,-2.5) 16(1.75,-2.5) 25(1.75,2.5) 26(1.25,2.5) 27(0.75,2.5) 28(0.25,2.5) 29(-0.25,2.5) 30(-0.75,2.5) 31(-1.25,2.5) 32(-1.75,2.5)
  rect 3.3x3.3 smd: 33(0,0)
  silkscreen extent -3.57,-2.6 2.6,2.6, body extent -2.58,-2.58 2.58,2.58, height 0.8
RV4162 [mm] "RTC"
  rect 0.5x0.8 smd: 1(-1.35,-0.6) 2(-0.45,-0.6) 3(0.45,-0.6) 4(1.35,-0.6) 5(1.35,0.6) 6(0.45,0.6) 7(-0.45,0.6) 8(-1.35,0.6)
  silkscreen extent -1.97,-0.91 1.83,0.75, body extent -1.6,-0.75 1.6,0.75, height 0.8
"SC-70-5 (DCK)" [mm]
  rect 0.4x0.9 smd mask+0.05: 1(-0.65,-1.1) 2(0,-1.1) 3(0.65,-1.1) 4(0.65,1.1) 5(-0.65,1.1)
  silkscreen extent -1.18,-1.23 1.1,0.7, body extent -1.1,-0.7 1.1,0.7, height 1.1
SFM-105-02-L-S [mm] "Samtec TFM, single row, 5 pos"
  rect 0.73x3.43 smd: 1(-2.54,-0.95) 2(-1.27,0.95) 3(0,-0.95) 4(1.27,0.95) 5(2.54,-0.95)
  silkscreen extent -4.8,-2.32 4.8,2.33, body extent -5.15,-0.9 5.15,1.53, height 4.57
SLF10145 [mm] "TDK chip inductors"
  rect 2.5x3.2 smd: 1(-4.05,0) 2(4.05,0)
  silkscreen extent -5.1,-5.1 5.1,5.1, body extent -5.1,-5.1 5.1,5.1, height 4.5
TSX-3225 [mm] "Seiko Epson TSX-3225 Crystal"
  rect 1.4x1.15 smd: 1(-1.1,-0.8) 2(1.1,-0.8) 3(1.1,0.8) 4(-1.1,0.8)
  silkscreen extent -2.17,-1.3 0.25,1.25, body extent -1.6,-1.25 1.6,1.25, height 0.6
WSON [mm] "QFN, 8-Leads, Body 8.00x6.00mm, Pitch 1.27mm, Thermal Pad 6.00x4.80mm, IPC Medium Density"
  oval 0.8x0.4 smd: 1(-3.95,1.905) 2(-3.95,0.635) 3(-3.95,-0.635) 4(-3.95,-1.905) 5(3.95,-1.905) 6(3.95,-0.635) 7(3.95,0.635) 8(3.95,1.905)
  rect 6x4.8 smd: 9(0,0)
  silkscreen extent -4.82,-3.2 4.2,3.2, body extent -4.05,-3.05 4.05,3.05, height 0.8

## Part data
ANT1: "2.4GHz Surface Mount Device (SMD) On Ground Antenna, 50 Ohms"
B1: "2.45 GHz Balun for nRF8001"
B2: "2.45 GHz Balun for TI CC253X"
C1 C3 C5 C6 C8 C9 C10 C16 C19 C22 C23 C30 C34 C46 C47: library part C_0.1u_0402_ceramic, "Ceramic capacitor, 0.1u, 0402 package"
C2 C4 C11 C17 C21 C33: library part C_1u_0402_ceramic, "Ceramic capacitor, 1 uF, 0402 package"
C7: library part C_220p_0402_ceramic, "Ceramic capacitor, 220 pF, 0402 package"
C12 C28 C36 C39 C43: library part C_1000p_0402_ceramic, "Ceramic capacitor, 1000 pF, 0402 package"
C13: library part C_4.7u_2220_ceramic, "Ceramic capacitor, 4.7u, 2220 package"
C14: library part C_100u_1210_ceramic, "Ceramic capacitor, 100u, 1210 package"
C15: library part C_100u_2917_tantalum, "Tantalum capacitor, 100u, 2917 package"
C18 C32: library part C_10u_0603_ceramic, "Ceramic capacitor, 10 uF, 0603 package"
C20: library part C_4.7u_0603_tantalum, "Tantalum capacitor, 4.7 uF, 0603 package"
C24 C25: library part C_47p_0402_ceramic, "Ceramic capacitor, 47 pF, 0402 package"
C26 C27: library part C_22p_0402_ceramic, "Ceramic capacitor, 22 pF, 0402 package"
C29: library part C_1u_0603_ceramic, "Ceramic capacitor, 1 uF, 0603 package"
C31: library part C_0.033u_0402_ceramic, "Ceramic capacitor, 0.033 uF, 0402 package"
C35: library part C_2200p_0402_ceramic, "Ceramic capacitor, 2200 pF, 0402 package"
C37 C38 C44 C45: library part C_12p_0402_ceramic, "Ceramic capacitor, 12 pF, 0402 package"
C40 C41 C42: library part C_100p_0402_ceramic, "Ceramic capacitor, 100 pF, 0402 package"
D1 D3: library part D_LED_GREEN_0402, "LED, Green,  0402"
D2: library part D_LED_RED_0402, "LED, Red, 0402"
FB1 FB2: library part FB_150mA_0402, "Ferrite Bead, 150 mA, 0402 package"
J1: library part "Micro USB", "CONN USB MICRO B RECPT SMT R/A"
J2 J3 J4 J5: library part "Samtec conntector", "Samtec connector, 1.27 mm, single row, 5 pos SMD"
L1: "Inductor, 22 uH, TDK SLF10145"
L2: library part L_15n_0402, "Chip inductor, 15 nH, 0402 package"
L3: library part L_10u_0603, "Chip inductor, 10 uH, 0603 package"
P1: "100 mils standard header"
P2: "2x2 100 mil header SMD"
R1 R21 R23 R24: library part R_100K_0402, "Chip resistor, 100K, 0402 package"
R2 R20: library part R_2.2K_0402, "Chip resistor, 2.2K, 0402 package"
R3: library part R_56K_0402, "Chip resistor, 56K, 0402 package"
R4 R11: library part R_619_0402, "Chip resistor, 619, 0402 package"
R5 R6 R7 R14: library part R_0_0402, "Chip resistor, 0, 0402 package"
R8 R9: library part R_33_0402, "Chip resistor, 33, 0402 package"
R10: library part R_750_0402, "Chip resistor, 750, 0402 package"
R12 R13 R15 R16 R17 R18 R19: library part R_10K_0402, "Chip resistor, 10K, 0402 package"
R22: library part R_22K_0402, "Chip resistor, 22K, 0402 package"
SW1: "SLIDE SWITCHES"
U1: "A Powerful System-On-Chip for 2.4-GHz IEEE 802.15.4, 6LoWPAN  and ZigBee Applications"
U2: "High Efficiency, 65V 500mA synchronous Step-Down Converter"
U3: "FT232R USB UART"
U4: "Single-chip Bluetooth low energy solution"
U5: "LOW POWER, 1.8/2.5/3.3-V INPUT, 3.3-V CMOS OUTPUT, SINGLE  SCHMITT-TRIGGER INVERTER GATE"
U6: "64 Mbit SPI Serial Dual I/O Flash"
U7: "GaAs Integrated Circuit for L, S-Band SPDT Switch"
Y1: "32768 Hz SMD Low profile crystal"
Y2 Y3: "MHz Range Crystal Unit"
Y4: "Real Time Clock Module with I2C Bus"

## Via types
v1: diameter 20, hole 8, Top Layer to Bottom Layer, 136 vias
v2: diameter 21.65, hole 7.87, Top Layer to Bottom Layer, 40 vias
v3: diameter 22, hole 10, Top Layer to Bottom Layer, 28 vias
v4: diameter 40, hole 20, Top Layer to Bottom Layer, 2 vias
v5: diameter 30, hole 14, Top Layer to Bottom Layer, 1 vias
v6: diameter 31.5, hole 15.75, Top Layer to Bottom Layer, tented top, 1 vias

## Nets (pads, with @x,y where several pads share a name; then routed paths per layer and width w, separated by ;. In a path a pad name is that pad's centre, name@x,y a point inside that pad or via, vN(x,y) a via of type N, cw(c..) or ccw(c..) an arc to the next point about the centre after c; other vN are vias at no path point)
ANTENNA: ANT1.1 C41.2 | length 183.7
  Top Layer w13.02: ANT1.1 249.25,-702.08 C41.2
B\L\E\_\C\S\: U1.53 U4.12 | length 282.8
  Top Layer w8: U1.53 162.94,-57.88 270.3,-165.24 U4.12
B\L\E\_\R\D\Y\: U1.52 U4.16 | length 338.8
  Top Layer w8: U1.52 162.42,-77.57 260,-175.15 260,-228.98 275,-243.98 U4.16
B\L\E\_\R\E\S\E\T\: R20.1 U1.51 | length 358.4
  Top Layer w8: U1.51 86.36,-96.78 161.83,-96.78 246,-180.94 246,-235.74 276.4,-266.15 R20.1
BLE_ACTIVE: U1.54 U4.6 | length 338.6
  Top Layer w8: U1.54 86.36,-38.51 378.57,-38.51 390.61,-50.56 U4.6
BLE_ANT_N: B1.3 U4.22 | length 92.3
  Top Layer w10: U4.22 449.67,-296.78 449.83,-296.94 449.83,-343.43 B1.3
BLE_ANT_P: B1.4 U4.21 | length 90.6
  Top Layer w10: B1.4 429.83,-347.45 429.83,-296.94 429.98,-296.78 U4.21
CC2538/N\R\F\8\0\0\1\: C39.2 U1.50 U5.2 U7.6 | length 714.6
  Top Layer w8: U1.50 113.39,-116.94 118.55,-111.78 146.83,-111.78 v1(151.83,-116.78)
  Top Layer w10: v1(312.43,-547.43) U7.6 C39.2@360.46,-583.12
  Bottom Layer w8: v1(151.83,-116.78) 261.83,-226.78 261.83,-253.83 330,-322 330,-475
  Bottom Layer w10: v1(312.43,-547.43) 330,-529.85 330,-475 345,-460 U5.2
CC2538_RESETN: P2.1 R2.2 R6.2 | length 1606
  Top Layer w8: v1@-295,235 v1(-290,230) ; P2.1@445,470.27 v1(515,425)
  Signal Layer 2 w8: v1(-350,-240) -350,170 v1(-290,230) -275,245 345,245 515,415 v1(515,425)
  Bottom Layer w8: v1(-350,-240) -330,-260 R2.2 ; v1(-290,230) -275,245 R6.2
CC2538_RF_N: B2.3 U1.38 | length 204.7
  Top Layer w10: U1.38 -18.95,-304.02 -18.8,-304.18 -18.8,-461.78 -9.39,-471.19 -5.61,-471.19 B2.3
CC2538_RF_P: B2.4 U1.37 | length 203.4
  Top Layer w10: B2.4 -50.72,-471.19 -48.2,-471.19 -38.8,-461.78 -38.8,-304.18 -38.64,-304.02 U1.37
F\L\A\S\H\_\C\S\: U1.26 U6.1 | length 491.4
  Top Layer w6: v1(-259.58,-215.36) U1.26
  Signal Layer 1 w8: v1(-259.58,-215.36) -234.64,-215.36 -225,-225 -225,-265 -255,-295 -255,-443.59 v1(-146.8,-551.8)
  Bottom Layer w8: U6.1 v1(-146.8,-551.8)
F\L\A\S\H\_\H\O\L\D\: R23.2 U1.25 U6.7 | length 498.4
  Top Layer w6: v1(-285,-180) -269.32,-195.68 U1.25
  Signal Layer 1 w8: v1(-499.34,-424.34) -499.34,-354.34 -325,-180 v1(-285,-180)
  Bottom Layer w6: v1(-499.34,-424.34) U6.7 ; R23.2 -305,-160 v1(-285,-180)
F\L\A\S\H\_\W\P\: R24.2 U1.27 U6.3 | length 581.4
  Top Layer w6: v1(-288.17,-226.78) -279.9,-235.05 U1.27
  Signal Layer 1 w8: v1(-288.17,-226.78) -288.17,-476.83 -204.34,-560.66 v1(-204.34,-635.66)
  Bottom Layer w8: U6.3 v1(-204.34,-635.66) -202.72,-637.28 R24.2
GND: B1.2 B2.2 B2.5 B2.6 C1.2 C2.2 C3.2 C4.2 C5.2 C6.2 C7.2 C8.2 C9.2 C10.2 C11.2 C12.2 C13.2 C14.2 C15.2 C16.2 C17.2 C18.2 C19.2 C20.2 C21.2 C22.2 C23.2 C24.2 C25.2 C26.2 C27.2 C28.2 C29.2 C30.2 C31.2 C32.2 C33.2 C34.2 C35.2 C36.2 C37.2 C38.2 C39.1 C43.2 C44.1 C45.1 C46.2 C47.2 J1.5 J1.6 J2.2 J2.3 J2.4 J2.5 J3.5 J4.5 J5.5 P2.2 R3.2 R4.2 R15.1 R16.1 R17.1 R18.1 R19.1 R22.2 U1.1 U1.57 U2.7 U2.8 U2.14 U2.16 U2.17 U3.4 U3.17 U3.20 U3.24 U3.26 U3.33 U4.8 U4.17 U4.18 U4.23 U4.30 U4.31 U4.33 U5.3 U6.4 U6.9 U7.2 Y2.2 Y2.4 Y3.2 Y3.4 Y4.3 | length 4305.3
  Top Layer w8: C8.2 v1(-297.72,57.28) ; v1(-227.4,-677.6) -227.4,-592.4 ; C16.2 -167.28,740 J1.6@-125,740 ; v1(-180.88,-384.5) -175.53,-379.14 Y3.4 ; C45.1@-135.88,-475.68 Y3.2 ; B2.6 B2.5 ; C25.2 v1(-33,170) ; C24.2 98.72,148.72 v1(125,175) ; Y4.3 v1(144.28,-365.72) ; C27.2 C26.2 ; C33.2 v1(526.83,48.17)
  Top Layer w10: v1(-524.53,300.47) U2.14 ; v1(-523.9,261.1) U2.16 ; U2.7 U2.8 v1(-324.29,434.29) ; C31.2 v1(436.83,33.22) ; C30.2 v1(481.83,33.22)
  Top Layer w20: J1.6@125,740 165,740 205,700 v4(205,645) P2.2@265,585 ; v4(610,357) 610,355.26 J5.5
  Top Layer w30: v1@-643.55,-373.55 J4.5
  Bottom Layer w8: R15.1 R16.1 ; v1(-500,30) R16.1 ; v1(-455,30) R17.1 ; v1(-410,30) R18.1 ; U6.4 v1(-227.4,-677.6) ; C9.2 -273.28,-93 -310.38,-93 -338,-65.38 -338,-28.28 -354,-12.28 R19.1 R18.1 ; C12.2 -247.28,-362.72 -225.5,-384.5 v1(-180.88,-384.5) -172.66,-392.72 C4.2 -133.22,-404.5 C1.2 -83.17,-404.5 C3.2 ; C6.2 -95.72,170 v1(-33,170) ; C7.2 C5.2 69.5,-384.5 v1(75,-390) ; C10.2 v1(114.12,-349.5) ; C2.2 v1(117.72,82.72) 135,65.43 C11.2 ; C32.2 v1(670,-60) ; C28.2 v1(645,-225) ; R16.1 R17.1 ; R17.1 R18.1
  Bottom Layer w10: v1(-325,475) -214.16,364.16 U3.4 -69.84,364.16 v6(-60,374) ; C22.2 C21.2 -125.98,606.73 J1.6@-125.98,641.57 ; v1(-33,170) -10.79,192.21 U3.26 -10.79,324.79 v6(-60,374) ; U3.24 125,218.53 v1(125,175) ; J1.5 119.09,634.68 J1.6@125.98,641.57 ; 135,265 C20.2 113.19,367.28 C23.2 63.44,383.84 U3.20 U3.33@-50.16,383.84 ; v1(147.72,557.28) R4.2 147.72,482.72 140,475 C19.2 97.72,457.72 82.9,442.9 U3.17 8.9,442.9 U3.33@-50.16,383.84 ; C34.2 v1(325,0) ; U5.3 v1(430.59,-485.59) ; v6(-60,374) U3.33@-50.16,383.84
  Bottom Layer w20: J1.6@-125.98,641.57 -125.98,739.02 -125,740 J1.6@-47.24,740 ; J1.6@47.24,740 125,740 125.98,739.02 J1.6@125.98,641.57
  Bottom Layer w30: J2.2 -675.45,-226.93 J2.4 ; J2.3 -588.6,-250.46 J2.5
  other v1: -645,-375 -610,-365 -725,-75 625,20 360,45 695,45 755,70 370,105 250,170 -645,375 -575,375 -550,425 -610,430 -520,475 -575,480 -480,515 -535,525 -435,555 -490,570 -400,590 -445,610 -400,640
  other v2: -300.95,-613.49 -373.59,-566.32 -313.68,-553.59 -253.77,-540.85 -446.23,-519.15 -386.32,-506.41 -326.41,-493.68 -399.05,-446.51 -176.43,-235.05 -89.82,-235.05 -3.2,-235.05 376.83,-218.39 420.14,-218.39 463.45,-218.39 -133.13,-191.74 -46.51,-191.74 40.1,-191.74 376.83,-175.09 463.45,-175.09 -176.43,-148.43 -89.82,-148.43 -3.2,-148.43 376.83,-131.78 420.14,-131.78 463.45,-131.78 -133.13,-105.13 -46.51,-105.13 40.1,-105.13 -176.43,-61.82 -89.82,-61.82 -3.2,-61.82 -133.13,-18.51 -46.51,-18.51 40.1,-18.51 -426.65,286.69 -383.35,286.69 -426.65,330 -383.35,330 -426.65,373.31 -383.35,373.31
  other v3: 335,-685 400,-655 460,-610 -105,-590 -50,-590 0,-590 50,-590 100,-590 530,-560 365,-540 460,-540 510,-510 590,-500 320,-270 715,-255 690,-195 730,-195 690,-125 745,-125 275,-65 750,-60 300,170 350,170
I2C_SCL: R12.2 U1.31 Y4.8 | length 634.2
  Top Layer w8: v1(-180,-350) -180,-355 -157.06,-332.06 -157.06,-281.62 U1.31 ; Y4.8 v1(240.62,-440.62)
  Signal Layer 2 w8: v1(-180,-350) -110,-420 220,-420 v1(240.62,-440.62)
  Bottom Layer w8: R12.2@178.34,-440.62 v1(240.62,-440.62)
I2C_SDA: R13.2 U1.30 Y4.1 | length 633.4
  Top Layer w8: v1(-177.87,-320) -176.43,-318.57 U1.30 ; Y4.1 v1(238.38,-393.38)
  Signal Layer 2 w8: v1(-177.87,-320) -167.47,-320 -145.35,-297.88 222.88,-297.88 238.38,-313.38 v1(238.38,-393.38)
  Bottom Layer w8: R13.2@179.34,-393.38 v1(238.38,-393.38)
JTAG_TCK: P2.4 U1.47 | length 1032.1
  Top Layer w6: U1.47 124.01,-175.99 v1(124.01,-179.01) ; P2.4 375,620.41 v1(375,610)
  Signal Layer 1 w6: v1(124.01,-179.01) 105,-160 105,-110 200,-15 200,335 375,510 v1(375,610)
JTAG_TMS: P2.3 U1.46 | length 974.5
  Top Layer w6: U1.46 86.36,-198.01 146.99,-198.01 v1(170,-175)
  Top Layer w8: v1(450,525) 476.35,551.35 P2.3
  Signal Layer 1 w8: v1(170,-175) 225,-120 225,300 v1(450,525)
LED_DRIVE0: J3.2 U1.8 | length 817.2
  Top Layer w8: U1.8 v1(-78.01,58.01)
  Signal Layer 2 w6: v1(-78.01,58.01) -78.01,113.01
  Signal Layer 2 w8: -78.01,113.01 -50,141.02 441.02,141.02 v1(475,175)
  Bottom Layer w8: v1(475,175) 475,205 482.5,212.5 J3.2
LED_DRIVE1: J3.3 U1.48 | length 843.4
  Top Layer w8: U1.48 146.31,-156.31 v1(147.61,-155)
  Bottom Layer w8: v1(147.61,-155) 115,-155 115,-153.28 105,-143.28 105,-105 345,135 480,135 520,175 J3.3
LED_DRIVE2: J3.4 U1.49 | length 660.8
  Top Layer w8: U1.49 123.38,-136.62 v1(125,-135)
  Bottom Layer w8: v1(125,-135) 131.83,-128.17 131.83,-108.5 310.33,70 490,70 550,130 553.12,130 J3.4
NetB1_1: B1.1 C40.1 | length 126.8
  Top Layer w13.02: C40.1 399.55,-475.45 463.49,-411.51 B1.1
NetB1_5: B1.5 C35.1 U4.20 | length 177.3
  Top Layer w10: C35.1 364.12,-376.78 401.83,-376.78 ; U4.20 410.3,-323.32 391.83,-341.78 391.83,-366.78 401.83,-376.78 ; B1.5 401.83,-376.78
NetB2_1: B2.1 C42.1 | length 185.3
  Top Layer w13.02: B2.1 72.63,-527.37 98.22,-501.78 C42.1
NetC2_1: C2.1 C4.1 U1.32 U1.56 | length 647.4
  Top Layer w8: v1(-137.06,-317.88) U1.32 ; U1.56 v1(86.36,22.75)
  Signal Layer 1 w8: v1(-137.06,-317.88) -114.18,-295 35,-295 86.36,-243.64 v1(86.36,22.75)
  Bottom Layer w8: C4.1 -145,-325.82 v1(-137.06,-317.88) ; v1(86.36,22.75) 90,26.39 C2.1
NetC12_1: C12.1 R1.2 R2.1 U1.28 | length 149.1
  Top Layer w8: v1(-256.12,-254.73) U1.28
  Bottom Layer w8: C12.1@-285.45,-342.27 -285.45,-301.78 -285.45,-256.78 -283.4,-254.73 v1(-256.12,-254.73)
NetC13_1: C13.1 P1.2 U2.3
NetC20_1: C20.1 C23.1 FB2.1 U3.19 | length 638.6
  Signal Layer 1 w8: v1(-110,590) -80,620 5,620 v1(40,585)
  Bottom Layer w8: FB2.1 v1(-110,590) ; U3.19 39.24,402.72 C23.1 81.81,404.53 C20.1 159.53,404.53 180,425 180,565 160,585 v1(40,585)
NetC26_1: C26.1 U1.45 Y1.2 | length 137.4
  Top Layer w8: U1.45 137.02,-215.36 Y1.2 148.55,-223.35 174.61,-197.28 C26.1 ; Y1.2@150.03,-218.32 151.8,-220.09 Y1.2@156.83,-225.13
NetC27_1: C27.1 R14.1 U1.44 Y1.1 | length 160.6
  Top Layer w8: U1.44 110.1,-235.05 145.19,-270.13 R14.1 194.72,-302.44 C27.1@198.57,-306.28
NetC28_1: C28.1 C29.1 L2.1 U4.24 U4.26 U4.29 | length 387.2
  Top Layer w8: U4.24 v1(509.44,-270.56) ; U4.26 v1(549.3,-224.3)
  Top Layer w10: U4.29 562.46,-165.24 579.12,-148.59 L2.1 ; C29.1 v1(606.83,-151.78)
  Bottom Layer w8: v1(509.44,-270.56) 549.3,-230.7 v1(549.3,-224.3) C28.1@581.58,-224.3
  Bottom Layer w10: v1(549.3,-224.3) 549.3,-209.32 v1(606.83,-151.78)
NetC30_1: C30.1 U4.2 | length 55.3
  Top Layer w10: U4.2 469.35,-41.98 C30.1
NetC31_1: C31.1 U4.3 | length 55.4
  Top Layer w10: C31.1 449.67,-42.33 U4.3
NetC36_1: C36.1 R20.2 R21.1 U4.19 | length 219
  Top Layer w10: C36.1 R21.1 R20.2 371.83,-331.78 390.61,-313 U4.19
NetC37_1: C37.1 U4.28 Y2.1 | length 290.1
  Top Layer w8: U4.28 594.93,-184.93 623.31,-213.31 Y2.1 ; Y2.1@634.53,-327.28 C37.1@680,-327.28
NetC38_1: C38.1 U4.27 Y2.3 | length 366
  Top Layer w8: U4.27 515.61,-204.3 584.3,-204.3 590,-210 590,-305 580,-315 580,-390 568.5,-401.5 Y2.3 547.2,-412 C38.1
NetC40_2: C40.2 U7.1 | length 53.2
  Top Layer w13.02: U7.1 360.46,-500.44 C40.2
NetC41_1: C41.1 U7.5 | length 45.9
  Top Layer w13.02: C41.1 U7.5
NetC42_2: C42.2 U7.3 | length 52.2
  Top Layer w12.3: U7.3@259.91,-501.78 U7.3
  Top Layer w13.02: C42.2 U7.3@259.91,-501.78
NetC44_2: C44.2 U1.34 Y3.1 | length 232.3
  Top Layer w6: Y3.1 -133.55,-424.42 -114.01,-404.87 -114.01,-360.37 -97.69,-344.05 U1.34 ; Y3.1@-131.71,-424.42 Y3.1@-128.82,-424.42
  Top Layer w8: C44.2 -153.84,-412.28 Y3.1
NetC45_2: C45.2 U1.35 Y3.3 | length 246.4
  Top Layer w6: C45.2 -80.45,-456.78 -68.17,-456.78 -53.17,-441.78 -53.17,-391.78 -65.8,-379.14 Y3.3 ; Y3.3@-78.01,-375.76 -82.17,-371.6 -82.17,-285.46 U1.35
NetD1_2: D1.2 R4.1 | length 34.6
  Bottom Layer w8: D1.2 R4.1
NetD2_1: D2.1 R10.1 | length 160.7
  Top Layer w6: R10.1 -293,141 -285,149 -180,149 -166,135 D2.1
NetD2_2: D2.2 U1.13 | length 66.9
  Top Layer w6: U1.13 -176.43,79.85 D2.2
NetD3_1: D3.1 R11.2 | length 35.3
  Top Layer w6: -251,125.72 D3.1@-215.72,125.72
NetD3_2: D3.2 U1.14 | length 68.6
  Top Layer w6: D3.2@-209,91 -196.12,78.12 U1.14
NetL1_2: L1.2 U2.1
NetL2_2: L2.2 L3.1 | length 61.1
  Top Layer w10: L2.2 614.55,-78.59 L3.1
NetL3_2: L3.2 U4.32 | length 89.2
  Top Layer w10: U4.32 570.02,-51.78 L3.2
NetR3_1: R3.1 U1.42 | length 52.7
  Top Layer w8: U1.42 59.79,-317.02 R3.1
NetR6_1: R6.1 U3.32 | length 62.5
  Bottom Layer w6: R6.1 -140,245 -128.9,256.1 U3.32
NetR15_2: R15.2 SW1.2 U1.19 | length 679.1
  Top Layer w8: SW1.2 -470,-308.13 -470,-105 v1(-475,-100) -452.88,-77.88 -223.01,-77.88 U1.19
  Bottom Layer w8: R15.2 -545,-75 -520,-100 v1(-475,-100)
NetR16_2: R16.2 SW1.4 U1.20 | length 657.5
  Top Layer w8: SW1.4 -357.6,-362.4 -450,-270 v1(-450,-125) -422.25,-97.25 U1.20
  Bottom Layer w8: R16.2 -497.28,-47.72 -450,-95 v1(-450,-125)
NetR17_2: R17.2 SW1.6 U1.21 | length 667.9
  Top Layer w8: SW1.6 -305,-422.4 -305,-385 -425,-265 v1(-425,-150) -391.94,-116.94 U1.21
  Bottom Layer w8: R17.2 -455,-55 -425,-85 v1(-425,-150)
NetR18_2: R18.2 SW1.8 U1.22 | length 662.2
  Top Layer w8: SW1.8 -273.73,-386.27 -400,-260 v1(-400,-175) -361.62,-136.62 U1.22
  Bottom Layer w8: R18.2 -400,-57.72 v1(-400,-175)
NetR19_2: R19.2 SW1.10 U1.23 | length 674.1
  Top Layer w8: SW1.10 -231.8,-393.2 -375,-250 v1(-375,-200) -330.99,-155.99 -222.69,-155.99 U1.23
  Bottom Layer w8: v1(-375,-200) -375,-57.72 R19.2
NetR22_1: R22.1 U4.25 | length 57.8
  Top Layer w8: U4.25 523.91,-252.28 R22.1@570,-252.28
NetU2_6: U2.6 U2.10 | length 201.4
  Top Layer w8: U2.10 -460.79,379.21 -440,400 -365,400 -355,390 -355,365 -349.53,359.53 U2.6
NETWORK_C\S\: J5.2 U1.9 | length 894.2
  Top Layer w6: U1.9 v1(-97.69,77.31)
  Top Layer w8: v1(425,175) 467,133 597.82,133 J5.2
  Signal Layer 2 w8: v1(-97.69,77.31) -97.69,150 -52.69,195 405,195 v1(425,175)
NETWORK_CTRL: J5.4 U1.12 | length 881.6
  Top Layer w6: U1.12 v1(-156.75,56.75)
  Top Layer w8: v1(425,250) 549.54,250 J5.4@550,250.46
  Signal Layer 2 w8: v1(-156.75,56.75) -157.06,57.06 -157.06,167.94 -100,225 400,225 v1(425,250)
NETWORK_INT: J5.3 U1.11 | length 972.1
  Top Layer w6: U1.11 v1(-137.06,77.94)
  Top Layer w8: v1(425,210) 511,210 540,181 J5.3
  Signal Layer 2 w8: v1(-137.06,77.94) -137.06,137.94 -65,210 v1(425,210)
ROM_CONTROL: U1.18 U3.31 | length 569.6
  Top Layer w6: v1(-254.27,-57.88) U1.18
  Bottom Layer w6: v1(-254.27,-57.88) -292.12,-57.88 -310,-40 -310,-15 -275,20 -275,190 -250,215 -120,215 -109.21,225.79 U3.31
ROM_UART_RXD: U1.16 U3.30 | length 462.2
  Top Layer w6: v1(-254.9,-18.51) U1.16
  Bottom Layer w6: v1(-254.9,-18.51) -254.9,175.1 -230,200 -115,200 -89.53,225.47 U3.30
ROM_UART_TXD: U1.17 U3.2 | length 764.1
  Top Layer w6: v1(-276.75,-38.2) U1.17
  Bottom Layer w6: v1(-276.75,-38.2) -236.8,-38.2 -230,-45 -230,-65 -245,-80 -305,-80 -325,-60 -325,290 -290.21,324.79 U3.2
RTC_CLKOUT: R14.2 Y4.2 | length 78
  Top Layer w8: R14.2 159.16,-337.87 179.72,-358.43 Y4.2
RTC_INT: U1.29 Y4.6 | length 531.6
  Top Layer w6: v1(144.28,-470.28) Y4.6
  Top Layer w8: v1(-210,-330) -197.87,-317.87 -197.87,-283.06 U1.29
  Signal Layer 2 w8: v1(-210,-330) -210,-390 -129.72,-470.28 v1(144.28,-470.28)
SPI_MISO: J4.4 U1.5 U4.14 U6.2 | length 2620.6
  Top Layer w6: U1.5 v1(-18.95,76.05)
  Top Layer w8: v1(281.83,-221.78) 299,-204.61 U4.14
  Top Layer w10: J4.4 -504.47,-221.54 -500,-220 v1(-505,-220)
  Signal Layer 1 w8: v1(-505,-220) -520,-220 -577.35,-162.65 -590,-150 -590,65 -456,199 -114,199 -18.95,103.95 v1(-18.95,76.05)
  Signal Layer 1 w10: -577.35,-162.65 -577.35,-436.58 ccw(c50,-15) -255.58,-706.32 -226.55,-706.32 ccw(c-226.55,-629.92) -172.53,-683.94 ccw(c-187.65,-668.82) -166.27,-668.82 v1(-166.27,-593.73)
  Signal Layer 2 w8: v1(-18.95,76.05) -16.27,78.73 74.27,78.73 203,-50 203,-142.94 v1(281.83,-221.78)
  Bottom Layer w8: U6.2 v1(-166.27,-593.73)
SPI_MOSI: J4.3 U1.6 U4.13 U6.5 | length 2117.8
  Top Layer w6: U1.6 v1(-38.64,58.64)
  Top Layer w8: J4.3 -540,-180 v1(-515,-180) cw(c-515,-212.59) -502.51,-182.49 cw(c-515,-212.59) -491.95,-189.55 cw(c-511.16,-208.75) -485.69,-199.31 cw(c-511.16,-208.75) -485,-201.45 ; v1(-550,-410) -550,-340 -485,-275 -485,-201.45 ; -484,-208.75 ccw(c-511.16,-208.75) -485,-201.45 ; v1(281.83,-186.78) 283.68,-184.93 U4.13
  Signal Layer 1 w6: v1(-38.64,58.64) -38.64,93.64
  Signal Layer 1 w8: v1(-515,-180) -520,-180 -570,-130 -570,60 -485,145 -90,145 -38.64,93.64
  Signal Layer 2 w6: v1(-38.64,58.64) -38.64,91.36
  Signal Layer 2 w8: -38.64,91.36 -25,105 185,105 225,65 225,-129.94 v1(281.83,-186.78)
  Bottom Layer w8: v1(-550,-410) -550,-479.47 U6.5
SPI_SCK: J4.2 U1.7 U4.11 U6.6 | length 1950.2
  Top Layer w6: U1.7 v1(-58.32,76.68)
  Top Layer w8: J4.2 v1(-540,-130) ; v1(286.83,-141.78) 290.61,-145.56 U4.11
  Signal Layer 1 w8: v1(-523.73,-466.27) -523.73,-343.73 -450,-270 -450,-180 -500,-130 v1(-540,-130) -540,70 -485,125 -106.65,125 v1(-58.32,76.68)
  Signal Layer 2 w8: v1(-58.32,76.68) -58.32,106.68 -40,125 195,125 250,70 250,-104.94 v1(286.83,-141.78)
  Bottom Layer w8: v1(-523.73,-466.27) U6.6
USB_FTDI_N: R5.1 U3.15 | length 54.3
  Bottom Layer w8: U3.15 -10.79,499.62 0,510.41 R5.1
USB_FTDI_P: R7.1 U3.14 | length 53.8
  Bottom Layer w8: R7.1 -40,510.41 -30.47,500.88 U3.14
USB_MCU_N: C25.1 R8.2 U1.3 | length 123.5
  Top Layer w6: C25.1 -6,113.28 R8.2 20.42,86.87 U1.3
USB_MCU_P: C24.1 R9.2 U1.2 | length 123.3
  Top Layer w6: U1.2 40.1,87.39 R9.2 66,113.28 C24.1
USB_N: J1.2 R5.2 R8.1 | length 854.5
  Top Layer w8: v1(-35,680) -35,620 -64,591 -64,570.06 -49.94,556 -30,556 -6,580 v1(0,580) ; R8.1 v1(8,173)
  Signal Layer 1 w8: v1(0,580) -7,573 -7,257.46 53.46,197 61.94,197 76,182.94 76,163.06 61.94,149 32,149 v1(8,173)
  Bottom Layer w8: v1(-35,680) -25.59,670.59 J1.2 ; R5.2 v1(0,580)
USB_P: J1.3 R7.2 R9.1 | length 677.6
  Top Layer w8: v1(-40,580) -16,604 -6,604 5,615 v1(5,680) ; R9.1 v1(52,173)
  Signal Layer 1 w8: v1(-40,580) -25,565 -25,250 v1(52,173)
  Bottom Layer w8: R7.2 v1(-40,580) ; J1.3 0,675 v1(5,680)
VCC3.3: C14.1 C15.1 FB1.2 J3.1 J5.1 L1.1 U2.9 | length 669.3
  Top Layer w20: C15.1 255,355 335,355 391,299 391,154 459,86 586,86 J5.1
  Top Layer w30: C15.1@250,360 C15.1@255,355
  other v1: 215,415 255,450 215,490
VCC3.3_MAIN: C1.1 C3.1 C5.1 C6.1 C7.1 C8.1 C9.1 C10.1 C11.1 C16.1 C17.1 C18.1 C32.1 C33.1 C34.1 C46.1 C47.1 FB1.1 R1.1 R10.2 R11.1 R12.1 R13.1 R21.2 R23.1 R24.1 SW1.1 SW1.3 SW1.5 SW1.7 SW1.9 SW1.11 U1.10 U1.15 U1.24 U1.33 U1.36 U1.39 U1.40 U1.41 U1.43 U1.55 U4.1 U4.9 U5.5 U6.8 Y4.5 | length 1946.4
  Top Layer w6: R10.2 -251,90.28 -251,86 v1(-225,60) ; C8.1 -224.94,25 v1(-222.69,22.75) ; v1(-257.38,-175.99) U1.24 ; U1.10 v1(-117.38,58.62) ; C47.1 v1(73.72,-449.72) 99.76,-449.72 Y4.5
  Top Layer w8: U1.15 v1(-222.69,22.75) ; v1(-118.17,-336.78) -117.06,-335.68 -117.06,-281.62 U1.33 ; v1(-63.17,-321.78) -58.48,-321.78 -58.32,-321.62 U1.36 ; U1.39 0.73,-315.68 v1(6.83,-321.78) 20.42,-308.2 U1.40 ; v1(36.83,-321.78) 40.1,-318.51 U1.41 ; v1(86.36,-276.31) U1.43 ; U1.55 v1(120.1,-18.51) ; v1(205,-345) 244.62,-345 R21.2
  Top Layer w10: v5(-575,-490) -518.67,-546.33 SW1.1 SW1.3 SW1.5 SW1.7 SW1.9 SW1.11 -271.28,-710 -210,-710 -197.72,-697.72 v1(-197.72,-672.72) ; v1@291.83,-106.78 v1(292.43,-106.19) U4.9 ; U4.1 499,-79.61 v1(521.83,-56.78) C33.1@521.83,-19.5
  Bottom Layer w6: v1(-257.38,-175.99) C9.1@-257.38,-147.09 ; v1(-117.38,58.62) -117.38,112.91 C6.1 ; v1(73.72,-449.72) 132.57,-449.72 R12.1
  Bottom Layer w8: C46.1 -472.4,-355.12 v1(-472.4,-382.4) U6.8 ; R23.1 -287.28,-130 -271.72,-130 C9.1 ; R1.1 v1(-225,-300) ; v1(-197.72,-672.72) R24.1 ; v1(-118.17,-336.78) -118.17,-354.06 C1.1 ; v1(-63.17,-321.78) -58.17,-326.78 C3.1@-58.17,-349.06 ; C7.1 6.83,-334.06 v1(6.83,-321.78) ; C5.1@36.83,-344.06 v1(36.83,-321.78) ; C10.1@86.36,-313.59 v1(86.36,-276.31) v1@86.83,-276.78 ; v1(120.1,-18.51) 135,-3.61 C11.1 ; v1(286.69,-458.31) U5.5 ; v1@291.83,-106.78 v1(292.43,-106.19) C34.1
  Bottom Layer w10: R12.1 R13.1 ; v1(521.83,-56.78) 552.25,-56.78 C32.1
  other v3: -245,615 -195,615 -245,665 -195,665 -285,705
VCC3.3_USB: C19.1 D1.1 U1.4 U3.1 U3.16 | length 946.9
  Top Layer w6: U1.4 v1(0.73,58.73)
  Signal Layer 1 w8: v1(-158.43,280) -158.43,267.14 1.05,107.67 1.05,59.05 v1(0.73,58.73)
  Signal Layer 2 w8: v1(-158.43,280) -158.43,531.57 -135,555 v1(40,555)
  Bottom Layer w8: v1(-158.43,280) U3.1 ; U3.16 59.71,472.43 C19.1 42.28,495 D1.1 42.28,552.72 v1(40,555)
VCONT2: C43.1 U5.4 U7.4 | length 156.1
  Top Layer w10: C43.1 U7.4@257.58,-586.78 ; U7.4 v1(261.24,-546.24)
  Bottom Layer w10: v1(261.24,-546.24) 261.24,-511.04 U5.4
VIN: J2.1 J4.1 P1.1 | length 359.8
  Top Layer w30: J4.1 -670,-94.81 P1.1@-670,45
  Bottom Layer w30: P1.1@-670,45 -670,-74.74 J2.1
VUSB: C21.1 C22.1 FB2.2 J1.1 P1.3 | length 811.4
  Bottom Layer w15: P1.3 -635,270 -372.72,532.28 C22.1 C21.1 FB2.2 -82.72,532.28 -75,540 -75,582.72 -51.18,606.54 J1.1
pads on no net: ANT1. B1.6 J1.4 SW1.12 U2.5 U2.11 U2.12 U3.3 U3.5 U3.6 U3.7 U3.8 U3.9 U3.10 U3.11 U3.12 U3.13 U3.18 U3.21 U3.22 U3.23 U3.25 U3.27 U3.28 U3.29 U4.4 U4.5 U4.7 U4.10 U4.15 U5.1 Y4.4 Y4.7

## Polygon pours and split planes (outlines as drawn)
GND on GND Plane "Bottom Layer-No Net" (solid, pour order 22): -803,-4 ccw(c-3,-4) -3,-804 ccw(c-3,-4) 797,-4 ccw(c-3,-4) -3,796 ccw(c-3,-4)
GND on Bottom Layer "Bottom Layer-No Net" (solid, pour order 20): 105,280 105,115 375,115 375,280
GND on Bottom Layer "Bottom Layer-No Net" (solid, pour order 31): -674.2,-422.98 -428.81,-343.58 -549.39,18.16 -794.79,-68.46 -797.63,-113.13 -778.74,-216.91 -724.68,-354.39 -699.18,-394.23
GND on Bottom Layer "Bottom Layer-No Net" (solid, pour order 32): 524.7,208.23 608.54,-30.06 801.38,29.27 785.05,156.16 747.59,282.53
VCC3.3 on Bottom Layer "Bottom Layer-No Net" (solid, pour order 18): 455,305 510,250 520.98,254.77 725,320 710,365 693.19,400 340,400 340,530 170,530 170,305
GND on Bottom Layer "Bottom Layer-No Net" (solid, pour order 28): -529.54,150.44 -529.54,-619.56 220.46,-619.56 220.46,-769.56 221.49,-769.76 249.73,-766.98 405.3,-693.41 513.77,-617.01 596.7,-534.08 646.57,-473.31 685.41,-415.19 725.08,-340.97 766.66,-240.58 767.28,-238.53 789.77,-129.88 793.6,-109.84 801.91,-19.56 801.91,73.55 725.02,150.44
VCC3.3 on Top Layer "Bottom Layer-No Net" (solid, pour order 19): 35,305 340,305 340,400.21 340,532.72 215,530 -405,530 -520,415 -520,390 -455,390 -350,495 35,495
NetL1_2 on Top Layer "Bottom Layer-No Net" (solid, pour order 17): -353.94,275 -353.94,250 -260,250 -260,295 -155,295 -153.94,490 -285,490 -285,275
VCC3.3_MAIN on Top Layer "Bottom Layer-No Net" (solid, pour order 24): -279.43,541.81 -324.43,541.81 -324.43,731.81 -179.43,731.81 -174.43,726.81 -174.43,590 -260,590 -260,541.81
NetC13_1 on Top Layer "Bottom Layer-No Net" (solid, pour order 21): -720,120 -600,120 -600,150 -315,150 -315,225 -315,240 -360,240 -360,275 -300,275 -300,325 -370,325 -370,240 -625,240 -625,220 -720,220
GND on Top Layer "Bottom Layer-No Net" (solid, pour order 23): 105,55 105,280 375,280 375,55
GND on Top Layer "Bottom Layer-No Net" (solid, pour order 27): -530,150 -530,-620 220,-620 220,-770 221.03,-770.21 249.28,-767.42 404.84,-693.85 513.31,-617.45 596.25,-534.52 646.12,-473.75 684.95,-415.64 724.63,-341.41 766.21,-241.02 766.83,-238.97 789.32,-130.32 793.14,-110.28 801.46,-20 801.46,73.1 724.57,150
GND on Top Layer "Bottom Layer-No Net" (solid, pour order 30): -335,545 -335,720 -405.08,690.97 -522.46,612.54 -612.54,522.46 -680.24,421.15 -700,373.43 -700,335 -530,335 -530,425 -410,545
no net on Top Layer "Bottom Layer-No Net" (solid, shelved, pour order 26): -530,150 -530,-620 220,-620 220,-770 221.03,-770.21 249.28,-767.42 404.84,-693.85 513.31,-617.45 596.25,-534.52 646.12,-473.75 684.95,-415.64 724.63,-341.41 766.21,-241.02 766.83,-238.97 789.32,-130.32 793.14,-110.28 801.46,-20 801.46,73.1 724.57,150
GND on Top Layer "Bottom Layer-No Net" (solid, pour order 25): -530,150 -530,-620 220,-620 220,-770 221.03,-770.21 249.28,-767.42 404.84,-693.85 513.31,-617.45 596.25,-534.52 646.12,-473.75 684.95,-415.64 724.63,-341.41 766.21,-241.02 766.83,-238.97 789.32,-130.32 793.14,-110.28 801.46,-20 801.46,73.1 724.57,150
VCC3.3_MAIN on VCC Plane "Bottom Layer-No Net" (solid, pour order 29): -799,0 ccw(c1,0) 1,-800 ccw(c1,0) 801,0 ccw(c1,0) 1,800 ccw(c1,0)

## Keep-outs
Keep-Out Layer:
  circle w5: c0,0 r800

## Other copper
GND Plane:
  pour cut-out: 220,-616 219,-617 219,-802 -531,-802 -531,-615
  pour cut-out: 141,606 141,205 -260,205 -260,606
VCC Plane:
  pour cut-out: 220,-616 219,-617 219,-802 -531,-802 -531,-615
  pour cut-out: 147,606 147,205 -254,205 -254,606

## Silkscreen, mask and mechanical layers (free items; w line width, h text height)
Top Overlay:
  region: -475.97,-260.49 -408.02,-260.49 -408.02,-224.21 -421.84,-224.21 -421.84,-191.39 -388.16,-238.61 -385.85,-238.61 -351.59,-191.39 -351.59,-224.21 -365.41,-224.21 -365.41,-260.49 -297.47,-260.49 -297.47,-224.21 -311.29,-224.21 -311.29,-169.51 -297.47,-169.51 -297.47,-133.23 -351.31,-133.23 -385.85,-181.03 -387.58,-181.03 -422.13,-133.23 -475.97,-133.23 -475.97,-169.51 -462.73,-169.51 -462.73,-224.21 -475.97,-224.21
  text "TMS" at 185,690 h30
  text "GND" at 175,525 h30
  text "TCK" at 520,455 h30
  text "RST" at 365,400 h30
  text "USB" at -575,230 h30 r90
  text "VIN" at -575,20 h30 r90